# Altium PCB test.PcbDoc
Units mil, origin at the board's own origin, x right, y up, seen from the top; angles counter-clockwise.
Board outline 6000 x 4000 mil, 4 copper layers (Top Layer, Layer 1, Layer 2, Bottom Layer), stack 23.756 mil thick; 294 components, 277 nets, 1509 pads, 16 vias.
Unrouted connection lines stored in the file: 1091.
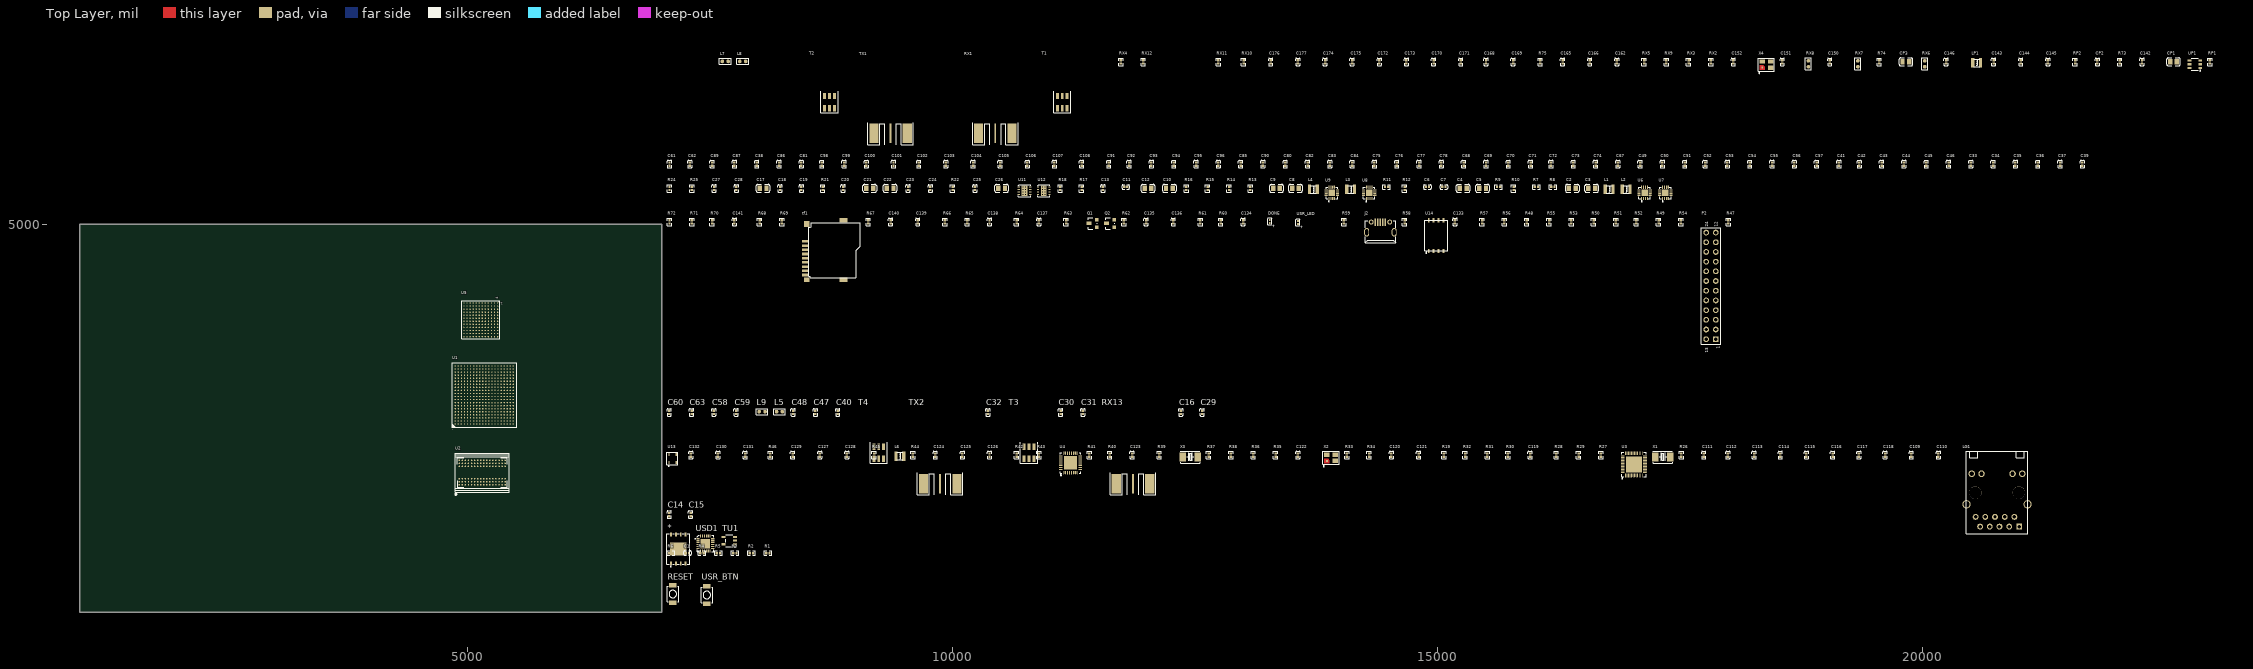
[diagram p0: Top Layer view]
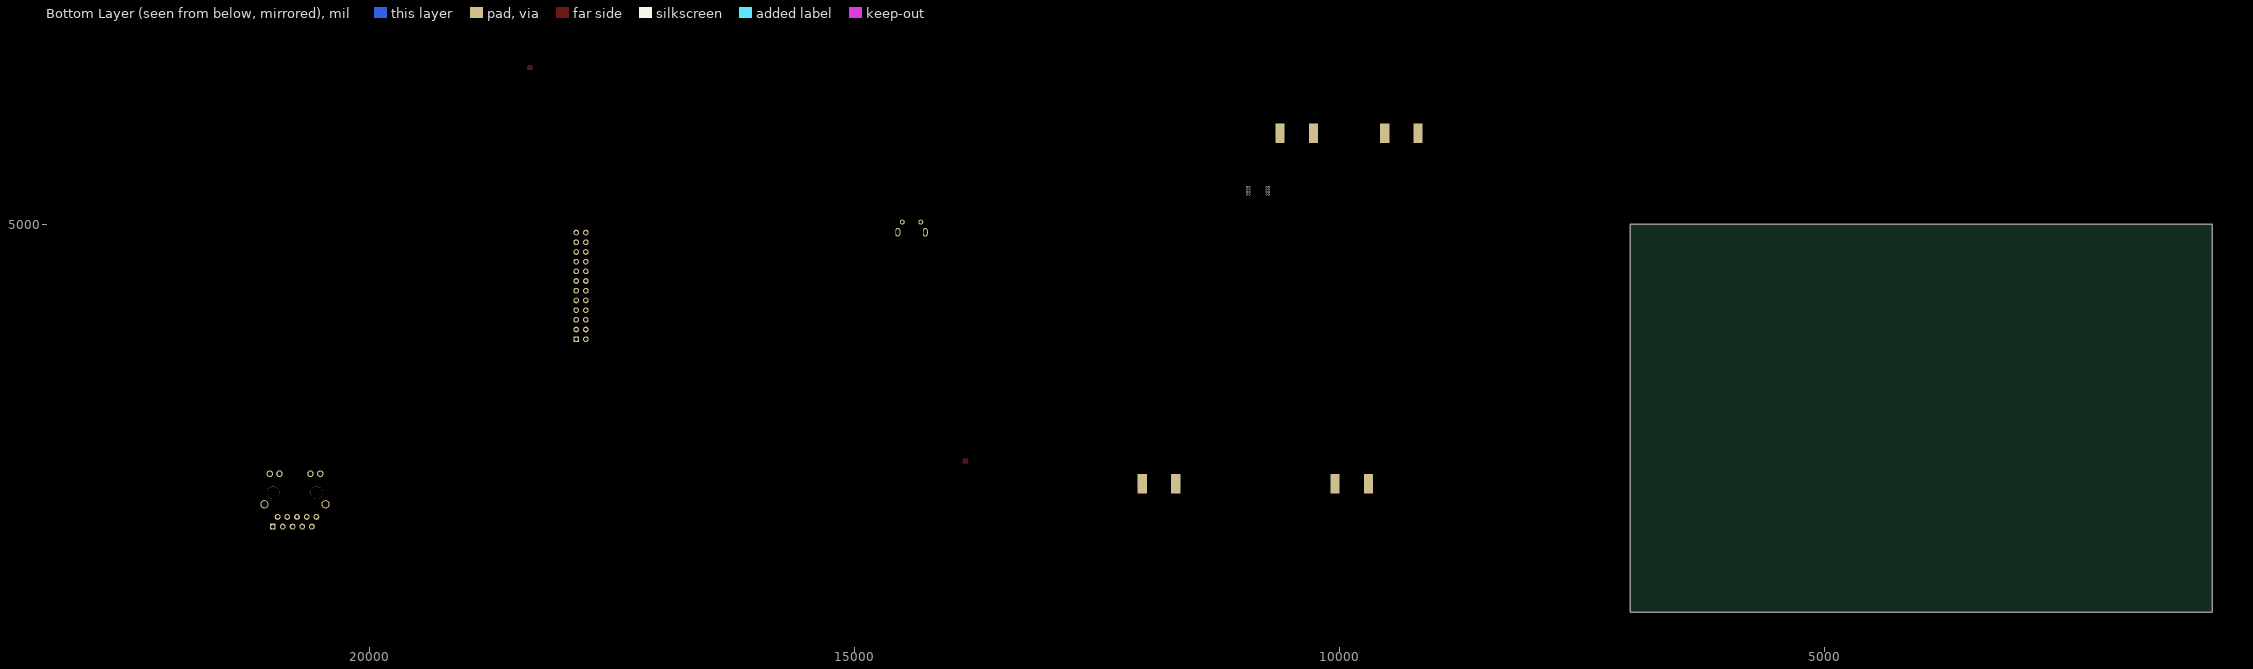
[diagram p1: Bottom Layer view, seen from below]

## Layer stack, top to bottom
Top Solder: solder mask 0.4, Solder Resist, Dk 3.5
Top Layer: signal copper 1.4
Dielectric 2: prepreg 2.8, PP-006, Dk 4.1
Layer 1: signal copper 1.378
Dielectric 1: dielectric 12.6, FR-4, Dk 4.8
Layer 2: signal copper 1.378
Dielectric 3: prepreg 2.8, PP-006, Dk 4.1
Bottom Layer: signal copper 1.4
Bottom Solder: solder mask 0.4, Solder Resist, Dk 3.5

## Board outline
1000,1000 7000,1000 7000,5000 1000,5000

## Design rules (kind name [scope] priority, off if disabled: settings)
Clearance [All] p1: gap=4 ignorepadtopadclearanceinfootprint=FALSE
ComponentClearance [All] p1: gap=0 collisioncheckmode=3 verticalgap=0 showdistances=FALSE
DiffPairsRouting [All] p1: maxlimit=10 minlimit=5 mostfreqgap=5 toplayer_minwidth=5 toplayer_maxwidth=15 toplayer_prefwidth=5 midlayer1_minwidth=5 midlayer1_maxwidth=15 midlayer1_prefwidth=5 midlayer2_minwidth=5 midlayer2_maxwidth=15 midlayer2_prefwidth=5 bottomlayer_minwidth=5 bottomlayer_maxwidth=15 bottomlayer_prefwidth=5 maxuncoupledlength=500
PolygonConnect [All] p1: connectstyle=Direct reliefconductorwidth=10 reliefentries=4 polygonreliefangle="90 Angle" airgapwidth=10
RoutingVias [All] p1: holewidth=7.87 width=17.72 viastyle="Through Hole" minholewidth=7.87 minwidth=15 maxholewidth=28 maxwidth=50
SolderMaskExpansion [All] p1: expansion=4 istentingtop=FALSE
Width [All] p1: maxlimit=100 minlimit=4 preferedwidth=4
28 further rules are at their usual default settings.

## Classes and differential pairs
component class "08 BALUN": C16 C29 C30 C31 C32 C40 C47 C48 C58 C59 C60 C63 L5 L7 L8 L9 RX1 RX13 T1 T2 T3 T4 TX1 TX2
net class DQ815: DDR3_DM1 DDR3_DQ8 DDR3_DQ9 DDR3_DQ10 DDR3_DQ11 DDR3_DQ12 DDR3_DQ13 DDR3_DQ14 DDR3_DQ15 DDR3_DQS1_N DDR3_DQS1_P
net class DQ07: DDR3_DM0 DDR3_DQ0 DDR3_DQ1 DDR3_DQ2 DDR3_DQ3 DDR3_DQ4 DDR3_DQ5 DDR3_DQ6 DDR3_DQ7 DDR3_DQS0_N DDR3_DQS0_P
net class ADDRES: DDR3_A0 DDR3_A1 DDR3_A2 DDR3_A3 DDR3_A4 DDR3_A5 DDR3_A6 DDR3_A7 DDR3_A8 DDR3_A9 DDR3_A10 DDR3_A11 DDR3_A12 DDR3_A13 DDR3_A14 DDR3_BA0 DDR3_BA1 DDR3_BA2 DDR3_CAS DDR3_CK_N DDR3_CK_P DDR3_CKE DDR3_CS DDR3_ODT DDR3_RAS DDR3_WE
component class "07 AD9363": C14 C15 C142 C143 C144 C145 C146 C150 C151 C152 C162 C165 C166 C168 C169 C170 C171 C172 C173 C174 C175 C176 C177 CP1 CP2 CP3 LP1 R73 R74 R75 RP1 RP2 RX2 RX3 RX4 RX5 RX6 RX7 RX8 RX9 RX10 RX11 RX12 U5 UP1 X4
component class "06 ZYNQ_POWER": C33 C34 C35 C36 C37 C38 C39 C41 C42 C43 C44 C45 C46 C49 C50 C51 C52 C53 C54 C55 C56 C57 C61 C62 C67 C68 C69 C70 C71 C72 C73 C74 C75 C76 C77 C78 C80 C81 C82 C83 C84 C85 C86 C87 C89 C90 C91 C92 C93 C94 C95 C96 C98 C99 C100 C101 C102 C103 C104 C105 C106 C107 C108
component class "05 POWER-SUPPLY": C2 C3 C4 C5 C6 C7 C8 C9 C10 C11 C12 C13 C17 C18 C19 C20 C21 C22 C23 C24 C25 C26 C27 C28 L1 L2 L3 L4 R7 R8 R9 R10 R11 R12 R13 R14 R15 R16 R17 R18 R21 R22 R24 R25 U6 U7 U8 U9 U11 U12
component class "04 ZYNQ_BANK0": * C133 C134 C135 C136 C137 C138 C139 C140 C141 DONE J2 P2 Q1 Q2 R47 R48 R49 R50 R51 R52 R53 R54 R55 R56 R57 R58 R59 R60 R61 R62 R63 R64 R65 R66 R67 R68 R69 R70 R71 R72 tf1 TU1 U14 USD1 USR_LED
component class "03 ZYNQ_PL-BANK34-35": U1
component class "02 ZYNQ_PS-BANK500-501": C109 C110 C111 C112 C113 C114 C115 C116 C117 C118 C119 C120 C121 C122 C123 C124 C125 C126 C127 C128 C129 C130 C131 C132 L6 LG1 R19 R26 R27 R28 R29 R30 R31 R32 R33 R34 R35 R36 R37 R38 R39 R40 R41 R42 R43 R44 R45 R46 RESET U3 U4 U13 USR_BTN X1 X2 X3
component class "01 ZYNQ_DDR": C1 R1 R2 R3 R4 R5 R6 U2
differential pair TX1B: +TX1B_P -TX1B_N
differential pair RX1B: +RX1B_P -RX1B_N
differential pair USB_OTG: +USB_OTG_P -USB_OTG_N
differential pair TXF: +TXF_P -TXF_N
differential pair TX_FRAME: +TX_FRAME_P -TX_FRAME_N
differential pair TX_D5: +TX_D5_P -TX_D5_N
differential pair TX_D4: +TX_D4_P -TX_D4_N
differential pair TX_D3: +TX_D3_P -TX_D3_N
differential pair TX_D2: +TX_D2_P -TX_D2_N
differential pair TX_D1: +TX_D1_P -TX_D1_N
differential pair TX_D0: +TX_D0_P -TX_D0_N
differential pair TX1A: +TX1A_P -TX1A_N
differential pair RX_FRAME: +RX_FRAME_P -RX_FRAME_N
differential pair RX_D5: +RX_D5_P -RX_D5_N
differential pair RX_D4: +RX_D4_P -RX_D4_N
differential pair RX_D3: +RX_D3_P -RX_D3_N
differential pair RX_D2: +RX_D2_P -RX_D2_N
differential pair RX_D1: +RX_D1_P -RX_D1_N
differential pair RX_D0: +RX_D0_P -RX_D0_N
differential pair RX1A: +RX1A_P -RX1A_N
differential pair PHY_MDI3: +PHY_MDI3_P -PHY_MDI3_N
differential pair PHY_MDI2: +PHY_MDI2_P -PHY_MDI2_N
differential pair PHY_MDI1: +PHY_MDI1_P -PHY_MDI1_N
differential pair PHY_MDI0: +PHY_MDI0_P -PHY_MDI0_N
differential pair FB: +FB_P -FB_N
differential pair FB_CLK: +FB_CLK_P -FB_CLK_N
differential pair DDR3_DQS1: +DDR3_DQS1_P -DDR3_DQS1_N
differential pair DDR3_DQS0: +DDR3_DQS0_P -DDR3_DQS0_N
differential pair DDR3_CK: +DDR3_CK_P -DDR3_CK_N
differential pair DATA_CLK: +DATA_CLK_P -DATA_CLK_N
differential pair 2: +2_P -2_N
differential pair 1: +1_P -1_N

## Components (designator, comment, footprint, x,y, rotation, side; value= is the part's Value field where it differs from the comment)
* "W25Q128" W25Q256 7171,1651 r0 top
C1 "104" LC-0402_C 7265,1610 r0 top
C2 "10μF" LC-0805_C 16390,5370 r0 top
C3 "10μF" LC-0805_C 16590,5370 r0 top
C4 "10μF" LC-0805_C 15265,5370 r0 top
C5 "10μF" LC-0805_C 15465,5370 r0 top
C6 "0.1μF" LC-0402_C 14895,5385 r0 top
C7 "0.1μF" LC-0402_C 15065,5385 r0 top
C8 "10μF" LC-0805_C 13535,5370 r0 top
C9 "10μF" LC-0805_C 13340,5370 r0 top
C10 "10μF" LC-0805_C 12235,5370 r0 top
C11 "0.1μF" LC-0402_C 11785,5385 r0 top
C12 "10μF" LC-0805_C 12015,5370 r0 top
C13 "0.1μF" LC-0402_C 11550,5370 r90 top
C14 "1μ" LC-0402_C 7077,2007 r90 top
C15 "0.001μ" LC-0402_C 7297,2007 r90 top
C16 "18p" LC-0402_C 12353,3061 r90 top
C17 "2.2μF" LC-0805_C 8045,5370 r0 top
C18 "0.1μF" LC-0402_C 8220,5370 r90 top
C19 "3.3nF" LC-0402_C 8440,5370 r90 top
C20 "2.2μF" LC-0402_C 8870,5370 r90 top
C21 "0.1μF" LC-0805_C 9145,5370 r0 top
C22 "2.2μF" LC-0805_C 9355,5370 r0 top
C23 "0.1μF" LC-0402_C 9540,5370 r90 top
C24 "3.3nF" LC-0402_C 9770,5370 r90 top
C25 "2.2μF" LC-0402_C 10230,5370 r90 top
C26 "0.1μF" LC-0805_C 10505,5370 r0 top
C27 "0.1μF" LC-0402_C 7540,5370 r90 top
C28 "0.1μF" LC-0402_C 7770,5370 r90 top
C29 "18p" LC-0402_C 12573,3061 r90 top
C30 "18p" LC-0402_C 11113,3061 r90 top
C31 "18p" LC-0402_C 11343,3061 r90 top
C32 "18p" LC-0402_C 10364,3061 r90 top
C33 "10μF" LC-0402_C 20500,5620 r90 top
C34 "10μF" LC-0402_C 20730,5620 r90 top
C35 "10μF" LC-0402_C 20960,5620 r90 top
C36 "10μF" LC-0402_C 21190,5620 r90 top
C37 "10μF" LC-0402_C 21420,5620 r90 top
C38 "10μF" LC-0402_C 7980,5620 r90 top
C39 "10μF" LC-0402_C 21650,5620 r90 top
C40 "18p" LC-0402_C 8815,3061 r90 top
C41 "10μF" LC-0402_C 19140,5620 r90 top
C42 "10μF" LC-0402_C 19350,5620 r90 top
C43 "10μF" LC-0402_C 19580,5620 r90 top
C44 "10μF" LC-0402_C 19810,5620 r90 top
C45 "10μF" LC-0402_C 20040,5620 r90 top
C46 "10μF" LC-0402_C 20270,5620 r90 top
C47 "18p" LC-0402_C 8585,3061 r90 top
C48 "18p" LC-0402_C 8355,3061 r90 top
C49 "10μF" LC-0402_C 17090,5620 r90 top
C50 "10μF" LC-0402_C 17320,5620 r90 top
C51 "10μF" LC-0402_C 17550,5620 r90 top
C52 "10μF" LC-0402_C 17760,5620 r90 top
C53 "10μF" LC-0402_C 17990,5620 r90 top
C54 "10μF" LC-0402_C 18220,5620 r90 top
C55 "10μF" LC-0402_C 18450,5620 r90 top
C56 "10μF" LC-0402_C 18680,5620 r90 top
C57 "10μF" LC-0402_C 18910,5620 r90 top
C58 "10μ" LC-0402_C 7537,3061 r90 top
C59 "0.001μ" LC-0402_C 7767,3061 r90 top
C60 "10μ" LC-0402_C 7077,3061 r90 top
C61 "10μF" LC-0402_C 7080,5620 r90 top
C62 "10μF" LC-0402_C 7290,5620 r90 top
C63 "0.001μ" LC-0402_C 7307,3061 r90 top
C67 "10μF" LC-0402_C 16860,5620 r90 top
C68 "10μF" LC-0402_C 15270,5620 r90 top
C69 "10μF" LC-0402_C 15500,5620 r90 top
C70 "10μF" LC-0402_C 15730,5620 r90 top
C71 "10μF" LC-0402_C 15960,5620 r90 top
C72 "10μF" LC-0402_C 16170,5620 r90 top
C73 "10μF" LC-0402_C 16400,5620 r90 top
C74 "10μF" LC-0402_C 16630,5620 r90 top
C75 "10μF" LC-0402_C 14350,5620 r90 top
C76 "10μF" LC-0402_C 14580,5620 r90 top
C77 "10μF" LC-0402_C 14810,5620 r90 top
C78 "10μF" LC-0402_C 15040,5620 r90 top
C80 "10μF" LC-0402_C 13430,5620 r90 top
C81 "10μF" LC-0402_C 8440,5620 r90 top
C82 "10μF" LC-0402_C 13660,5620 r90 top
C83 "10μF" LC-0402_C 13890,5620 r90 top
C84 "10μF" LC-0402_C 14120,5620 r90 top
C85 "10μF" LC-0402_C 12970,5620 r90 top
C86 "10μF" LC-0402_C 8210,5620 r90 top
C87 "10μF" LC-0402_C 7750,5620 r90 top
C89 "10μF" LC-0402_C 7520,5620 r90 top
C90 "10μF" LC-0402_C 13200,5620 r90 top
C91 "10μF" LC-0402_C 11610,5620 r90 top
C92 "10μF" LC-0402_C 11820,5620 r90 top
C93 "10μF" LC-0402_C 12050,5620 r90 top
C94 "10μF" LC-0402_C 12280,5620 r90 top
C95 "10μF" LC-0402_C 12510,5620 r90 top
C96 "10μF" LC-0402_C 12740,5620 r90 top
C98 "10μF" LC-0402_C 8650,5620 r90 top
C99 "10μF" LC-0402_C 8880,5620 r90 top
C100 "10μF" LC-0402_C 9110,5620 r90 top
C101 "10μF" LC-0402_C 9390,5620 r90 top
C102 "10μF" LC-0402_C 9650,5620 r90 top
C103 "10μF" LC-0402_C 9930,5620 r90 top
C104 "10μF" LC-0402_C 10210,5620 r90 top
C105 "10μF" LC-0402_C 10490,5620 r90 top
C106 "10μF" LC-0402_C 10770,5620 r90 top
C107 "10μF" LC-0402_C 11050,5620 r90 top
C108 "10μF" LC-0402_C 11330,5620 r90 top
C109 "1μ" LC-0402_C 19885,2620 r90 top
C110 "1μ" LC-0402_C 20165,2620 r90 top
C111 "1μ" LC-0402_C 17745,2620 r90 top
C112 "0.1μ" LC-0402_C 17995,2620 r90 top
C113 "1μ" LC-0402_C 18265,2620 r90 top
C114 "1μ" LC-0402_C 18535,2620 r90 top
C115 "1μ" LC-0402_C 18805,2620 r90 top
C116 "1μ" LC-0402_C 19075,2620 r90 top
C117 "18p" LC-0402_C 19345,2620 r90 top
C118 "18p" LC-0402_C 19615,2620 r90 top
C119 "0.01μ" LC-0402_C 15955,2620 r90 top
C120 "0.1μ" LC-0402_C 14525,2620 r90 top
C121 "10μ" LC-0402_C 14805,2620 r90 top
C122 "18p" LC-0402_C 13560,2620 r90 top
C123 "18p" LC-0402_C 11850,2620 r90 top
C124 "1μ" LC-0402_C 9820,2620 r90 top
C125 "1μ" LC-0402_C 10100,2620 r90 top
C126 "1μ" LC-0402_C 10380,2620 r90 top
C127 "1μ" LC-0402_C 8630,2620 r90 top
C128 "1μ" LC-0402_C 8910,2620 r90 top
C129 "4.7μ" LC-0402_C 8350,2620 r90 top
C130 "1μ" LC-0402_C 7580,2620 r90 top
C131 "1μ" LC-0402_C 7860,2620 r90 top
C132 "0.1μ" LC-0402_C 7300,2620 r90 top
C133 "0.1μ" LC-0402_C 15180,5025 r90 top
C134 "0.1μ" LC-0402_C 12995,5025 r90 top
C135 "4.7μ" LC-0402_C 11995,5025 r90 top
C136 "4.7μ" LC-0402_C 12275,5025 r90 top
C137 "4.7μ" LC-0402_C 10890,5025 r90 top
C138 "0.1μ" LC-0402_C 10380,5025 r90 top
C139 "10μ" LC-0402_C 9640,5025 r90 top
C140 "0.1μ" LC-0402_C 9360,5025 r90 top
C141 "0.1μ" LC-0402_C 7750,5025 r90 top
C142 "1μ" LC-0402_C 22265,6675 r90 top
C143 "0.1μ" LC-0402_C 20735,6675 r90 top
C144 "10μ" LC-0402_C 21015,6675 r90 top
C145 "1μ" LC-0402_C 21295,6675 r90 top
C146 "0.001μ" LC-0402_C 20245,6675 r90 top
C150 "18p" LC-0402_C 19045,6675 r90 top
C151 "0.001μ" LC-0402_C 18555,6675 r90 top
C152 "18p" LC-0402_C 18050,6675 r90 top
C162 "10μ" LC-0402_C 16850,6675 r90 top
C165 "10μ" LC-0402_C 16290,6675 r90 top
C166 "1μ" LC-0402_C 16570,6675 r90 top
C168 "1μ" LC-0402_C 15500,6675 r90 top
C169 "0.001μ" LC-0402_C 15780,6675 r90 top
C170 "1μ" LC-0402_C 14960,6675 r90 top
C171 "0.001μ" LC-0402_C 15240,6675 r90 top
C172 "1μ" LC-0402_C 14400,6675 r90 top
C173 "0.001μ" LC-0402_C 14680,6675 r90 top
C174 "1μ" LC-0402_C 13840,6675 r90 top
C175 "0.001μ" LC-0402_C 14120,6675 r90 top
C176 "1μ" LC-0402_C 13280,6675 r90 top
C177 "0.001μ" LC-0402_C 13560,6675 r90 top
CP1 "22uF" LC-0805_C 22590,6675 r0 top
CP2 "22pF" LC-0402_C 21805,6675 r90 top
CP3 "22uF" LC-0805_C 19830,6675 r0 top
DONE "LED" D0402 13270,5030 r90 top
J2 "microusb" "micro usb" 14315,5020 r0 top
L1 "2.2uH" L1008 16770,5360 r0 top
L2 "2.2uH" L1008 16945,5360 r0 top
L3 "2.2uH" L1008 14105,5360 r0 top
L4 "2.2uH" L1008 13720,5360 r0 top
L5 "330nh" LC-0603_L 8214,3068 r0 top
L6 "2.2uH" L1008 9455,2610 r0 top
L7 "330nh" LC-0603_L 7655,6680 r0 top
L8 "330nh" LC-0603_L 7835,6680 r0 top
L9 "330nh" LC-0603_L 8035,3068 r0 top
LG1 "HR911130C" HR911130C 20770,2155 r0 top
LP1 "4.7uH" L1008 20560,6665 r0 top
P2 "Header 12X2A" HDR2X12_CEN 17870,3815 r90 top
Q1 "AO3400" NMOS 11405,5010 r0 top
Q2 "AO3400" NMOS 11585,5010 r0 top
R1 "4.7K" LC-0402_R 8095,1610 r0 top
R2 "82R" LC-0402_R 7925,1610 r0 top
R3 "82R" LC-0402_R 7755,1610 r0 top
R4 "4.7K" LC-0402_R 7415,1610 r0 top
R5 "4.7K" LC-0402_R 7585,1610 r0 top
R6 "240R" LC-0402_R 7095,1610 r0 top
R7 "100K" LC-0402_R 16020,5385 r0 top
R8 "10K" LC-0402_R 16190,5385 r0 top
R9 "4.99K" LC-0402_R 15630,5385 r0 top
R10 "18.7K" LC-0402_R 15785,5370 r90 top
R11 "20K" LC-0402_R 14475,5385 r0 top
R12 "15K" LC-0402_R 14660,5370 r90 top
R13 "10K" LC-0402_R 13070,5370 r90 top
R14 "13K" LC-0402_R 12850,5370 r90 top
R15 "10K" LC-0402_R 12630,5370 r90 top
R16 "56.2K" LC-0402_R 12410,5370 r90 top
R17 "15K" LC-0402_R 11330,5370 r90 top
R18 "18K" LC-0402_R 11110,5370 r90 top
R19 "10K" LC-0402_R 15065,2620 r90 top
R21 "6.25K" LC-0402_R 8660,5370 r90 top
R22 "6.25K" LC-0402_R 10000,5370 r90 top
R24 "10K" LC-0402_R 7080,5370 r90 top
R25 "10K" LC-0402_R 7310,5370 r90 top
R26 "2.49K" LC-0402_R 17515,2620 r90 top
R27 "4.7K" LC-0402_R 16685,2620 r90 top
R28 "33R" LC-0402_R 16225,2620 r90 top
R29 "33R" LC-0402_R 16455,2620 r90 top
R30 "10K" LC-0402_R 15725,2620 r90 top
R31 "330R" LC-0402_R 15515,2620 r90 top
R32 "330R" LC-0402_R 15285,2620 r90 top
R33 "1.5K" LC-0402_R 14065,2620 r90 top
R34 "1.5K" LC-0402_R 14295,2620 r90 top
R35 "4.7K" LC-0402_R 13330,2620 r90 top
R36 "4.7K" LC-0402_R 13100,2620 r90 top
R37 "33R" LC-0402_R 12640,2620 r90 top
R38 "4.7K" LC-0402_R 12870,2620 r90 top
R39 "4.7K" LC-0402_R 12130,2620 r90 top
R40 "4.7K" LC-0402_R 11620,2620 r90 top
R41 "4.7K" LC-0402_R 11410,2620 r90 top
R42 "33R" LC-0402_R 10660,2620 r90 top
R43 "4.7K" LC-0402_R 10890,2620 r90 top
R44 "8.06K" LC-0402_R 9590,2620 r90 top
R45 "4.7K" LC-0402_R 9190,2620 r90 top
R46 "4.7K" LC-0402_R 8120,2620 r90 top
R47 "20K" LC-0402_R 18000,5025 r90 top
R48 "1K" LC-0402_R 15920,5025 r90 top
R49 "20K" LC-0402_R 17280,5025 r90 top
R50 "20K" LC-0402_R 16610,5025 r90 top
R51 "20K" LC-0402_R 16840,5025 r90 top
R52 "20K" LC-0402_R 17050,5025 r90 top
R53 "20K" LC-0402_R 16380,5025 r90 top
R54 "10K" LC-0402_R 17510,5025 r90 top
R55 "4.7K" LC-0402_R 16150,5025 r90 top
R56 "20K" LC-0402_R 15690,5025 r90 top
R57 "4.7K" LC-0402_R 15460,5025 r90 top
R58 "33R" LC-0402_R 14660,5025 r90 top
R59 "470R" LC-0402_R 14035,5025 r90 top
R60 "470R" LC-0402_R 12765,5025 r90 top
R61 "470R" LC-0402_R 12555,5025 r90 top
R62 "4.7K" LC-0402_R 11765,5025 r90 top
R63 "4.7K" LC-0402_R 11170,5025 r90 top
R64 "0R" LC-0402_R 10660,5025 r90 top
R65 "10K" LC-0402_R 10150,5025 r90 top
R66 "1K" LC-0402_R 9920,5025 r90 top
R67 "0R" LC-0402_R 9130,5025 r90 top
R68 "100K" LC-0402_R 8010,5025 r90 top
R69 "10K" LC-0402_R 8240,5025 r90 top
R70 "330R" LC-0402_R 7520,5025 r90 top
R71 "10K" LC-0402_R 7310,5025 r90 top
R72 "40.2R" LC-0402_R 7080,5025 r90 top
R73 "1R" LC-0402_R 22035,6675 r90 top
R74 "1R" LC-0402_R 19555,6675 r90 top
R75 "14.3K" LC-0402_R 16060,6675 r90 top
RESET "SW-PB" 开关 7114,1190 r90 top
RP1 "10K" LC-0402_R 22965,6675 r90 top
RP2 "20K" LC-0402_R 21575,6675 r90 top
RX1 "JCCEM001" CNSMARAL687W375H171 10440,5935 r90 top
RX2 "0R" LC-0402_R 17820,6675 r90 top
RX3 "0R" LC-0402_R 17590,6675 r90 top
RX4 "0R" LC-0402_R 11735,6675 r90 top
RX5 "0R" LC-0402_R 17130,6675 r90 top
RX6 "0R" LC-0603_L 20025,6655 r90 top
RX7 "0R" LC-0603_L 19335,6655 r90 top
RX8 "0R" LC-0603_L 18825,6655 r90 top
RX9 "0R" LC-0402_R 17360,6675 r90 top
RX10 "0R" LC-0402_R 13000,6675 r90 top
RX11 "0R" LC-0402_R 12740,6675 r90 top
RX12 "0R" LC-0402_R 11965,6675 r90 top
RX13 "JCCEM001" CNSMARAL687W375H171 11860,2323 r90 top
T1 "TCM1-63AX+" TSML150W160H160 11130,6260 r0 top
T2 "TCM1-63AX+" TSML150W160H160 8730,6260 r0 top
T3 "TCM1-63AX+" TSML150W160H160 10787,2644 r0 top
T4 "TCM1-63AX+" TSML150W160H160 9238,2644 r0 top
tf1 "TF-SD" TF 8675,4735 r0 top
TU1 "TPS2051BDBVR" TPS2051BDBVR 7711,1738 r0 top
TX1 "JCCEM001" CNSMARAL687W375H171 9360,5935 r90 top
TX2 "JCCEM001" CNSMARAL687W375H171 9871,2323 r90 top
U1 "XC7Z010-CLG400" CLG400-0.8 5170.28,3239.76 r90 top
U2 "MT41J64M16JT-187EG" FBGA96 4876.87,2215.43 r90 top
U3 "RTL8211E-VB-CG" LC-QFN-48_6x6x04P 17025,2525 r0 top
U4 "USB3320C" LC-QFN-32_5x5x05P 11215,2540 r0 top
U5 "AD9363" AD936X 5142.48,4051.46 r270 top
U6 "TLV62130" TLV62130RGT 17135,5325 r0 top
U7 "TLV62130" TLV62130RGT 17350,5325 r0 top
U8 "TLV62130" TLV62130RGT 14295,5325 r0 top
U9 "TLV62130" TLV62130RGT 13910,5325 r0 top
U11 "TPS7A8101" TPS7A8101 10740,5345 r0 top
U12 "TPS7A8101" TPS7A8101 10940,5345 r0 top
U13 "TCM811TE" TCM811TERCTR 7110,2585 r0 top
U14 "S25FL256SAGNFI00" MLP8 14985,4865 r90 top
UP1 "AP3419" AP3419 22815,6650 r0 top
USD1 "TXS02612RTWR" TXS02612RTWR 7453,1704 r0 top
USR_BTN "SW-PB" 开关 7464,1180 r90 top
USR_LED "LED" D0402 13560,5020 r90 top
X1 "25M" LC-SMD-5032_2P 17325,2600 r0 top
X2 "33.333MHz" OSC-SMD_4P-L3.2-W2.5-BL 13955,2615 r0 top
X3 "24M" LC-SMD-5032_2P 12450,2600 r0 top
X4 "40MHz" OSC-SMD_4P-L3.2-W2.5-BL 18445,6670 r0 top

## Footprints (in the part's own frame and the unit in brackets; to place one, negate y for a bottom-side part, rotate by r counter-clockwise, add the part's x,y. Pads: shape width x height; smd on the part's side, far side on the other; paste and mask are expansions set on the pad)
AD936X [mil]
  round 14 smd: A1(-137.01,164.51) A2(-105.51,164.51) A3(-74.02,164.51) A4(-42.52,164.51) A5(-11.02,164.51) A6(20.47,164.51) A7(51.97,164.51) A8(83.46,164.51) A9(114.96,164.51) A10(146.46,164.51) A11(177.95,164.51) A12(209.45,164.51) B1(-137.01,133.01) B2(-105.51,133.01) B3(-74.02,133.01) B4(-42.52,133.01) B5(-11.02,133.01) B6(20.47,133.01) B7(51.97,133.01) B8(83.46,133.01) B9(114.96,133.01) B10(146.46,133.01) B11(177.95,133.01) B12(209.45,133.01) C1(-137.01,101.52) C2(-105.51,101.52) C3(-74.02,101.52) C4(-42.52,101.52) C5(-11.02,101.52) C6(20.47,101.52) C7(51.97,101.52) C8(83.46,101.52) C9(114.96,101.52) C10(146.46,101.52) C11(177.95,101.52) C12(209.45,101.52) D1(-137.01,70.02) D2(-105.51,70.02) D3(-74.02,70.02) D4(-42.52,70.02) D5(-11.02,70.02) D6(20.47,70.02) D7(51.97,70.02) D8(83.46,70.02) D9(114.96,70.02) D10(146.46,70.02) D11(177.95,70.02) D12(209.45,70.02) E1(-137.01,38.52) E2(-105.51,38.52) E3(-74.02,38.52) E4(-42.52,38.52) E5(-11.02,38.52) E6(20.47,38.52) E7(51.97,38.52) E8(83.46,38.52) E9(114.96,38.52) E10(146.46,38.52) E11(177.95,38.52) E12(209.45,38.52) F1(-137.01,7.03) F2(-105.51,7.03) F3(-74.02,7.03) F4(-42.52,7.03) F5(-11.02,7.03) F6(20.47,7.03) F7(51.97,7.03) F8(83.46,7.03) F9(114.96,7.03) F10(146.46,7.03) F11(177.95,7.03) F12(209.45,7.03) G1(-137.01,-24.47) G2(-105.51,-24.47) G3(-74.02,-24.47) G4(-42.52,-24.47) G5(-11.02,-24.47) G6(20.47,-24.47) G7(51.97,-24.47) G8(83.46,-24.47) G9(114.96,-24.47) G10(146.46,-24.47) G11(177.95,-24.47) G12(209.45,-24.47) H1(-137.01,-55.96) H2(-105.51,-55.96) H3(-74.02,-55.96) H4(-42.52,-55.96) H5(-11.02,-55.96) H6(20.47,-55.96) H7(51.97,-55.96) H8(83.46,-55.96) H9(114.96,-55.96) H10(146.46,-55.96) H11(177.95,-55.96) H12(209.45,-55.96) J1(-137.01,-87.46) J2(-105.51,-87.46) J3(-74.02,-87.46) J4(-42.52,-87.46) J5(-11.02,-87.46) J6(20.47,-87.46) J7(51.97,-87.46) J8(83.46,-87.46) J9(114.96,-87.46) J10(146.46,-87.46) J11(177.95,-87.46) J12(209.45,-87.46) K1(-137.01,-118.96) K2(-105.51,-118.96) K3(-74.02,-118.96) K4(-42.52,-118.96) K5(-11.02,-118.96) K6(20.47,-118.96) K7(51.97,-118.96) K8(83.46,-118.96) K9(114.96,-118.96) K10(146.46,-118.96) K11(177.95,-118.96) K12(209.45,-118.96) L1(-137.01,-150.45) L2(-105.51,-150.45) L3(-74.02,-150.45) L4(-42.52,-150.45) L5(-11.02,-150.45) L6(20.47,-150.45) L7(51.97,-150.45) L8(83.46,-150.45) L9(114.96,-150.45) L10(146.46,-150.45) L11(177.95,-150.45) L12(209.45,-150.45) M1(-137.01,-181.95) M2(-105.51,-181.95) M3(-74.02,-181.95) M4(-42.52,-181.95) M5(-11.02,-181.95) M6(20.47,-181.95) M7(51.97,-181.95) M8(83.46,-181.95) M9(114.96,-181.95) M10(146.46,-181.95) M11(177.95,-181.95) M12(209.45,-181.95)
  silkscreen extent -161,-206 233,188
AP3419 [mm]
  rect 1x0.55 smd: 1(1.268,-0.95) 2(1.268,0) 3(1.268,0.95) 4(-1.532,0.95) 5(-1.532,0) 6(-1.532,-0.95)
  silkscreen extent -1.03,-1.78 1.39,1.55
CLG400-0.8 [mm]
  round 0.35 smd: A1(-7.6,7.6) A2(-6.8,7.6) A3(-6,7.6) A4(-5.2,7.6) A5(-4.4,7.6) A6(-3.6,7.6) A7(-2.8,7.6) A8(-2,7.6) A9(-1.2,7.6) A10(-0.4,7.6) A11(0.4,7.6) A12(1.2,7.6) A13(2,7.6) A14(2.8,7.6) A15(3.6,7.6) A16(4.4,7.6) A17(5.2,7.6) A18(6,7.6) A19(6.8,7.6) A20(7.6,7.6) B1(-7.6,6.8) B2(-6.8,6.8) B3(-6,6.8) B4(-5.2,6.8) B5(-4.4,6.8) B6(-3.6,6.8) B7(-2.8,6.8) B8(-2,6.8) B9(-1.2,6.8) B10(-0.4,6.8) B11(0.4,6.8) B12(1.2,6.8) B13(2,6.8) B14(2.8,6.8) B15(3.6,6.8) B16(4.4,6.8) B17(5.2,6.8) B18(6,6.8) B19(6.8,6.8) B20(7.6,6.8) C1(-7.6,6) C2(-6.8,6) C3(-6,6) C4(-5.2,6) C5(-4.4,6) C6(-3.6,6) C7(-2.8,6) C8(-2,6) C9(-1.2,6) C10(-0.4,6) C11(0.4,6) C12(1.2,6) C13(2,6) C14(2.8,6) C15(3.6,6) C16(4.4,6) C17(5.2,6) C18(6,6) C19(6.8,6) C20(7.6,6) D1(-7.6,5.2) D2(-6.8,5.2) D3(-6,5.2) D4(-5.2,5.2) D5(-4.4,5.2) D6(-3.6,5.2) D7(-2.8,5.2) D8(-2,5.2) D9(-1.2,5.2) D10(-0.4,5.2) D11(0.4,5.2) D12(1.2,5.2) D13(2,5.2) D14(2.8,5.2) D15(3.6,5.2) D16(4.4,5.2) D17(5.2,5.2) D18(6,5.2) D19(6.8,5.2) D20(7.6,5.2) E1(-7.6,4.4) E2(-6.8,4.4) E3(-6,4.4) E4(-5.2,4.4) E5(-4.4,4.4) E6(-3.6,4.4) E7(-2.8,4.4) E8(-2,4.4) E9(-1.2,4.4) E10(-0.4,4.4) E11(0.4,4.4) E12(1.2,4.4) E13(2,4.4) E14(2.8,4.4) E15(3.6,4.4) E16(4.4,4.4) E17(5.2,4.4) E18(6,4.4) E19(6.8,4.4) E20(7.6,4.4) F1(-7.6,3.6) F2(-6.8,3.6) F3(-6,3.6) F4(-5.2,3.6) F5(-4.4,3.6) F6(-3.6,3.6) F7(-2.8,3.6) F8(-2,3.6) F9(-1.2,3.6) F10(-0.4,3.6) F11(0.4,3.6) F12(1.2,3.6) F13(2,3.6) F14(2.8,3.6) F15(3.6,3.6) F16(4.4,3.6) F17(5.2,3.6) F18(6,3.6) F19(6.8,3.6) F20(7.6,3.6) G1(-7.6,2.8) G2(-6.8,2.8) G3(-6,2.8) G4(-5.2,2.8) G5(-4.4,2.8) G6(-3.6,2.8) G7(-2.8,2.8) G8(-2,2.8) G9(-1.2,2.8) G10(-0.4,2.8) G11(0.4,2.8) G12(1.2,2.8) G13(2,2.8) G14(2.8,2.8) G15(3.6,2.8) G16(4.4,2.8) G17(5.2,2.8) G18(6,2.8) G19(6.8,2.8) G20(7.6,2.8) H1(-7.6,2) H2(-6.8,2) H3(-6,2) H4(-5.2,2) H5(-4.4,2) H6(-3.6,2) H7(-2.8,2) H8(-2,2) H9(-1.2,2) H10(-0.4,2) H11(0.4,2) H12(1.2,2) H13(2,2) H14(2.8,2) H15(3.6,2) H16(4.4,2) H17(5.2,2) H18(6,2) H19(6.8,2) H20(7.6,2) J1(-7.6,1.2) J2(-6.8,1.2) J3(-6,1.2) J4(-5.2,1.2) J5(-4.4,1.2) J6(-3.6,1.2) J7(-2.8,1.2) J8(-2,1.2) J9(-1.2,1.2) J10(-0.4,1.2) J11(0.4,1.2) J12(1.2,1.2) J13(2,1.2) J14(2.8,1.2) J15(3.6,1.2) J16(4.4,1.2) J17(5.2,1.2) J18(6,1.2) J19(6.8,1.2) J20(7.6,1.2) K1(-7.6,0.4) K2(-6.8,0.4) K3(-6,0.4) K4(-5.2,0.4) K5(-4.4,0.4) K6(-3.6,0.4) K7(-2.8,0.4) K8(-2,0.4) K9(-1.2,0.4) K10(-0.4,0.4) K11(0.4,0.4) K12(1.2,0.4) K13(2,0.4) K14(2.8,0.4) K15(3.6,0.4) K16(4.4,0.4) K17(5.2,0.4) K18(6,0.4) K19(6.8,0.4) K20(7.6,0.4) L1(-7.6,-0.4) L2(-6.8,-0.4) L3(-6,-0.4) L4(-5.2,-0.4) L5(-4.4,-0.4) L6(-3.6,-0.4) L7(-2.8,-0.4) L8(-2,-0.4) L9(-1.2,-0.4) L10(-0.4,-0.4) L11(0.4,-0.4) L12(1.2,-0.4) L13(2,-0.4) L14(2.8,-0.4) L15(3.6,-0.4) L16(4.4,-0.4) L17(5.2,-0.4) L18(6,-0.4) L19(6.8,-0.4) L20(7.6,-0.4) M1(-7.6,-1.2) M2(-6.8,-1.2) M3(-6,-1.2) M4(-5.2,-1.2) M5(-4.4,-1.2) M6(-3.6,-1.2) M7(-2.8,-1.2) M8(-2,-1.2) M9(-1.2,-1.2) M10(-0.4,-1.2) M11(0.4,-1.2) M12(1.2,-1.2) M13(2,-1.2) M14(2.8,-1.2) M15(3.6,-1.2) M16(4.4,-1.2) M17(5.2,-1.2) M18(6,-1.2) M19(6.8,-1.2) M20(7.6,-1.2) N1(-7.6,-2) N2(-6.8,-2) N3(-6,-2) N4(-5.2,-2) N5(-4.4,-2) N6(-3.6,-2) N7(-2.8,-2) N8(-2,-2) N9(-1.2,-2) N10(-0.4,-2) N11(0.4,-2) N12(1.2,-2) N13(2,-2) N14(2.8,-2) N15(3.6,-2) N16(4.4,-2) N17(5.2,-2) N18(6,-2) N19(6.8,-2) N20(7.6,-2) P1(-7.6,-2.8) P2(-6.8,-2.8) P3(-6,-2.8) P4(-5.2,-2.8) P5(-4.4,-2.8) P6(-3.6,-2.8) P7(-2.8,-2.8) P8(-2,-2.8) P9(-1.2,-2.8) P10(-0.4,-2.8) P11(0.4,-2.8) P12(1.2,-2.8) P13(2,-2.8) P14(2.8,-2.8) P15(3.6,-2.8) P16(4.4,-2.8) P17(5.2,-2.8) P18(6,-2.8) P19(6.8,-2.8) P20(7.6,-2.8) R1(-7.6,-3.6) R2(-6.8,-3.6) R3(-6,-3.6) R4(-5.2,-3.6) R5(-4.4,-3.6) R6(-3.6,-3.6) R7(-2.8,-3.6) R8(-2,-3.6) R9(-1.2,-3.6) R10(-0.4,-3.6) R11(0.4,-3.6) R12(1.2,-3.6) R13(2,-3.6) R14(2.8,-3.6) R15(3.6,-3.6) R16(4.4,-3.6) R17(5.2,-3.6) R18(6,-3.6) R19(6.8,-3.6) R20(7.6,-3.6) T1(-7.6,-4.4) T2(-6.8,-4.4) T3(-6,-4.4) T4(-5.2,-4.4) T5(-4.4,-4.4) T6(-3.6,-4.4) T7(-2.8,-4.4) T8(-2,-4.4) T9(-1.2,-4.4) T10(-0.4,-4.4) T11(0.4,-4.4) T12(1.2,-4.4) T13(2,-4.4) T14(2.8,-4.4) T15(3.6,-4.4) T16(4.4,-4.4) T17(5.2,-4.4) T18(6,-4.4) T19(6.8,-4.4) T20(7.6,-4.4) U1(-7.6,-5.2) U2(-6.8,-5.2) U3(-6,-5.2) U4(-5.2,-5.2) U5(-4.4,-5.2) U6(-3.6,-5.2) U7(-2.8,-5.2) U8(-2,-5.2) U9(-1.2,-5.2) U10(-0.4,-5.2) U11(0.4,-5.2) U12(1.2,-5.2) U13(2,-5.2) U14(2.8,-5.2) U15(3.6,-5.2) U16(4.4,-5.2) U17(5.2,-5.2) U18(6,-5.2) U19(6.8,-5.2) U20(7.6,-5.2) V1(-7.6,-6) V2(-6.8,-6) V3(-6,-6) V4(-5.2,-6) V5(-4.4,-6) V6(-3.6,-6) V7(-2.8,-6) V8(-2,-6) V9(-1.2,-6) V10(-0.4,-6) V11(0.4,-6) V12(1.2,-6) V13(2,-6) V14(2.8,-6) V15(3.6,-6) V16(4.4,-6) V17(5.2,-6) V18(6,-6) V19(6.8,-6) V20(7.6,-6) W1(-7.6,-6.8) W2(-6.8,-6.8) W3(-6,-6.8) W4(-5.2,-6.8) W5(-4.4,-6.8) W6(-3.6,-6.8) W7(-2.8,-6.8) W8(-2,-6.8) W9(-1.2,-6.8) W10(-0.4,-6.8) W11(0.4,-6.8) W12(1.2,-6.8) W13(2,-6.8) W14(2.8,-6.8) W15(3.6,-6.8) W16(4.4,-6.8) W17(5.2,-6.8) W18(6,-6.8) W19(6.8,-6.8) W20(7.6,-6.8) Y1(-7.6,-7.6) Y2(-6.8,-7.6) Y3(-6,-7.6) Y4(-5.2,-7.6) Y5(-4.4,-7.6) Y6(-3.6,-7.6) Y7(-2.8,-7.6) Y8(-2,-7.6) Y9(-1.2,-7.6) Y10(-0.4,-7.6) Y11(0.4,-7.6) Y12(1.2,-7.6) Y13(2,-7.6) Y14(2.8,-7.6) Y15(3.6,-7.6) Y16(4.4,-7.6) Y17(5.2,-7.6) Y18(6,-7.6) Y19(6.8,-7.6) Y20(7.6,-7.6)
  silkscreen extent -9.02,-8.5 8.5,8.5
CNSMARAL687W375H171 [mil]
  rect 200x19 smd: 1(2.5,0)
  rect 200x95 smd: 2(2.5,172.5) 4(2.5,-172.5)
  rect 200x95 smd far side: 3(2.5,172.5) 5(2.5,-172.5)
  silkscreen extent -113,-235 113,235
D0402 [mm]
  rect 0.51x0.51 smd: 1(-0.41,0) 2(0.41,0)
  silkscreen extent -0.91,-0.5 0.91,0.5
FBGA96 [mm]
  round 0.4 smd: A1(2.504,-0.906) A2(3.304,-0.906) A3(4.104,-0.906) A7(7.304,-0.906) A8(8.104,-0.906) A9(8.904,-0.906) B1(2.504,-1.706) B2(3.304,-1.706) B3(4.104,-1.706) B7(7.304,-1.706) B8(8.104,-1.706) B9(8.904,-1.706) C1(2.504,-2.506) C2(3.304,-2.506) C3(4.104,-2.506) C7(7.304,-2.506) C8(8.104,-2.506) C9(8.904,-2.506) D1(2.504,-3.306) D2(3.304,-3.306) D3(4.104,-3.306) D7(7.304,-3.306) D8(8.104,-3.306) D9(8.904,-3.306) E1(2.504,-4.106) E2(3.304,-4.106) E3(4.104,-4.106) E7(7.304,-4.106) E8(8.104,-4.106) E9(8.904,-4.106) F1(2.504,-4.906) F2(3.304,-4.906) F3(4.104,-4.906) F7(7.304,-4.906) F8(8.104,-4.906) F9(8.904,-4.906) G1(2.504,-5.706) G2(3.304,-5.706) G3(4.104,-5.706) G7(7.304,-5.706) G8(8.104,-5.706) G9(8.904,-5.706) H1(2.504,-6.506) H2(3.304,-6.506) H3(4.104,-6.506) H7(7.304,-6.506) H8(8.104,-6.506) H9(8.904,-6.506) J1(2.504,-7.306) J2(3.304,-7.306) J3(4.104,-7.306) J7(7.304,-7.306) J8(8.104,-7.306) J9(8.904,-7.306) K1(2.504,-8.106) K2(3.304,-8.106) K3(4.104,-8.106) K7(7.304,-8.106) K8(8.104,-8.106) K9(8.904,-8.106) L1(2.504,-8.906) L2(3.304,-8.906) L3(4.104,-8.906) L7(7.304,-8.906) L8(8.104,-8.906) L9(8.904,-8.906) M1(2.504,-9.706) M2(3.304,-9.706) M3(4.104,-9.706) M7(7.304,-9.706) M8(8.104,-9.706) M9(8.904,-9.706) N1(2.504,-10.506) N2(3.304,-10.506) N3(4.104,-10.506) N7(7.304,-10.506) N8(8.104,-10.506) N9(8.904,-10.506) P1(2.504,-11.306) P2(3.304,-11.306) P3(4.104,-11.306) P7(7.304,-11.306) P8(8.104,-11.306) P9(8.904,-11.306) R1(2.504,-12.106) R2(3.304,-12.106) R3(4.104,-12.106) R7(7.304,-12.106) R8(8.104,-12.106) R9(8.904,-12.106) T1(2.504,-12.906) T2(3.304,-12.906) T3(4.104,-12.906) T7(7.304,-12.906) T8(8.104,-12.906) T9(8.904,-12.906)
  silkscreen extent -0.2,-14.01 10.8,0.2
HDR2X12_CEN [mm] "Connector; Header; 12x2 Position"
  rect 1.5x1.5 hole 0.9: 1(0,0)
  round 1.5 hole 0.9: 2(2.54,0) 3(5.08,0) 4(7.62,0) 5(10.16,0) 6(12.7,0) 7(15.24,0) 8(17.78,0) 9(20.32,0) 10(22.86,0) 11(25.4,0) 12(27.94,0) 13(0,2.54) 14(2.54,2.54) 15(5.08,2.54) 16(7.62,2.54) 17(10.16,2.54) 18(12.7,2.54) 19(15.24,2.54) 20(17.78,2.54) 21(20.32,2.54) 22(22.86,2.54) 23(25.4,2.54) 24(27.94,2.54)
  silkscreen extent -1.27,-1.27 29.21,3.81
HR911130C [mil]
  round 66.93 hole 43.31: 11(260,272.62) 12(160,272.62) 13(-160,272.62) 14(-260,272.62)
  rect 60x60 hole 35.83: P1(229.63,-272.62)
  round 60 hole 35.83: P2(179.1,-172.38) P3(125.2,-272.38) P4(79.1,-172.38) P5(25.2,-272.38) P6(-20.9,-172.38) P7(-74.8,-272.38) P8(-120.9,-172.38) P9(-174.8,-272.38) P10(-220.9,-172.38)
  round 85 hole 65: SHIELD0(-315,-42.48) SHIELD1(315,-42.48)
  round 127.95 hole 127.95 unplated: ""(-224.4,77.62) ""(224.4,77.62)
  silkscreen extent -315,-347 315,503
L1008 [mil]
  rect 33.5x98.4 smd: 1(-39.92,0) 2(40.08,0)
  silkscreen extent -31,-39 31,39
LC-0402_C [mm]
  rect 0.6x0.65 smd mask+0.051: 1(-0.425,0) 2(0.425,0)
  silkscreen extent -0.97,-0.58 0.98,0.58, body extent -0.48,-0.3 0.52,0.3, height 0.2
LC-0402_R [mm]
  rect 0.6x0.65 smd mask+0.051: 1(-0.425,0) 2(0.425,0)
  silkscreen extent -0.97,-0.58 0.97,0.58, body extent -0.57,-0.27 0.58,0.28, height 0.41
LC-0603_L [mm]
  oval 0.93x0.98 smd: 1(-0.77,0) 2(0.77,0)
  silkscreen extent -1.53,-0.79 1.54,0.79, body extent -0.8,-0.41 0.8,0.41, height 0.46
LC-0805_C [mm]
  rect 1.16x1.47 smd: 1(-0.89,0) 2(0.89,0)
  silkscreen extent -1.77,-1.04 1.77,1.04
LC-QFN-32_5x5x05P [mm]
  rect 3.5x3.5 smd paste-1.75 mask+0.051: 0(0,0)
  oval 0.28x0.9 smd mask+0.051: 1(-1.75,-2.55) 2(-1.25,-2.55) 3(-0.75,-2.55) 4(-0.25,-2.55) 5(0.25,-2.55) 6(0.75,-2.55) 7(1.25,-2.55) 8(1.75,-2.55) 17(1.75,2.55) 18(1.25,2.55) 19(0.75,2.55) 20(0.25,2.55) 21(-0.25,2.55) 22(-0.75,2.55) 23(-1.25,2.55) 24(-1.75,2.55)
  oval 0.9x0.28 smd mask+0.051: 9(2.55,-1.75) 10(2.55,-1.25) 11(2.55,-0.75) 12(2.55,-0.25) 13(2.55,0.25) 14(2.55,0.75) 15(2.55,1.25) 16(2.55,1.75) 25(-2.55,1.75) 26(-2.55,1.25) 27(-2.55,0.75) 28(-2.55,0.25) 29(-2.55,-0.25) 30(-2.55,-0.75) 31(-2.55,-1.25) 32(-2.55,-1.75)
  silkscreen extent -2.7,-3.35 2.7,2.7
LC-QFN-48_6x6x04P [mm]
  rect 4.2x4.2 smd mask+0.051: 0(0,0)
  oval 0.22x1 smd mask+0.051: 1(-2.2,-2.9) 2(-1.8,-2.9) 3(-1.4,-2.9) 4(-1,-2.9) 5(-0.6,-2.9) 6(-0.2,-2.9) 7(0.2,-2.9) 8(0.6,-2.9) 9(1,-2.9) 10(1.4,-2.9) 11(1.8,-2.9) 12(2.2,-2.9) 25(2.2,2.9) 26(1.8,2.9) 27(1.4,2.9) 28(1,2.9) 29(0.6,2.9) 30(0.2,2.9) 31(-0.2,2.9) 32(-0.6,2.9) 33(-1,2.9) 34(-1.4,2.9) 35(-1.8,2.9) 36(-2.2,2.9)
  oval 1x0.22 smd mask+0.051: 13(2.9,-2.2) 14(2.9,-1.8) 15(2.9,-1.4) 16(2.9,-1) 17(2.9,-0.6) 18(2.9,-0.2) 19(2.9,0.2) 20(2.9,0.6) 21(2.9,1) 22(2.9,1.4) 23(2.9,1.8) 24(2.9,2.2) 37(-2.9,2.2) 38(-2.9,1.8) 39(-2.9,1.4) 40(-2.9,1) 41(-2.9,0.6) 42(-2.9,0.2) 43(-2.9,-0.2) 44(-2.9,-0.6) 45(-2.9,-1) 46(-2.9,-1.4) 47(-2.9,-1.8) 48(-2.9,-2.2)
  silkscreen extent -3.2,-3.85 3.2,3.2
LC-SMD-5032_2P [mil]
  rect 66.92x94.48 smd: 1(-77.18,0.02) 2(77.18,-0.02)
  silkscreen extent -99,-66 98,61
"micro usb" [mm]
  rect 0.4x2 smd: 1(1.145,0.066) 2(1.795,0.066) 3(2.445,0.066) 4(3.095,0.066) 5(3.745,0.066)
  round 1.3 hole 0.7: 6(4.87,0.074) 9(0.02,0.074)
  oval 1.3x2.199 hole 0.7 slot 1.5 at 90 deg: 7(6.045,-2.597) 8(-1.155,-2.597)
  silkscreen extent -1.55,-5.33 6.45,0.42
MLP8 [mil]
  rect 43.3x19.7 smd: 1(-138.85,75) 2(-138.85,25) 3(-138.85,-25) 4(-138.85,-75) 5(176.15,-75) 6(176.15,-25) 7(176.15,25) 8(176.15,75)
  silkscreen extent -165,-118 176,118
NMOS [mil]
  rect 36x36 smd: 1(80,-39) 2(80,36)
  rect 50x36 smd: 3(0,-1)
  silkscreen extent -5,-59 85,56
OSC-SMD_4P-L3.2-W2.5-BL [mm]
  rect 0.5x0.5 smd: 1(-2.454,-1.371)
  rect 1.4x1.15 smd: 2(-0.254,-1.371) 3(-0.254,0.229) 4(-2.454,0.229)
  Top Layer region: -3.154,-0.796 -2.116,-0.796 -1.754,-1.175 -1.754,-1.946 -3.154,-1.946
  silkscreen extent -3.45,-2.92 0.75,1.13
TCM811TERCTR [mil]
  rect 12x30 smd: 1(-36,-41.3) 2(39,-41.3) 3(39,41.3) 4(-36,41.3)
  silkscreen extent -56,-81 56,66
TF [mm]
  rect 1.4x1.6 smd: 0(-4.55,6.85)
  rect 1.6x0.7 smd: 1(-5.05,2.25) 2(-5.05,1.15) 3(-5.05,0.05) 4(-5.05,-1.05) 5(-5.05,-2.15) 6(-5.05,-3.25) 7(-5.05,-4.35) 8(-5.05,-5.45) 9(-5.05,-6.55)
  rect 1.4x1.2 smd: 10(-4.55,-7.75)
  rect 2.2x1.2 smd: 11(5.05,-7.75) 12(5.05,7.75)
  silkscreen extent -4.06,-7.29 9.47,7.15
TLV62130RGT [mil]
  oval 11x33.5 smd: 1(-29.5,-58.6) 2(-9.8,-58.6) 3(9.8,-58.6) 4(29.5,-58.6) 9(29.5,57.6) 10(9.8,57.6) 11(-9.8,57.6) 12(-29.5,57.6)
  oval 33.5x11 smd: 5(58.1,-30) 6(58.1,-10.3) 7(58.1,9.3) 8(58.1,29) 13(-58.1,29) 14(-58.1,9.3) 15(-58.1,-10.3) 16(-58.1,-30)
  rect 66.9x66.9 smd: 20(0,-0.5)
  silkscreen extent -59,-94 59,59
TPS7A8101 [mm]
  rect 1.5x2.8 smd: 0(0,0)
  rect 0.6x0.3 smd: 1(-1.5,0.975) 2(-1.5,0.325) 3(-1.5,-0.325) 4(-1.5,-0.975) 5(1.5,-0.975) 6(1.5,-0.325) 7(1.5,0.325) 8(1.5,0.975)
  silkscreen extent -1.6,-1.6 1.6,1.6, body extent -1.5,-1.5 1.5,1.5, height 0.6
TPS2051BDBVR [mm]
  rect 1x0.55 smd: 1(1.087,-0.95) 2(1.087,0) 3(1.087,0.95) 4(-1.913,0.95) 5(-1.913,-0.95)
  silkscreen extent -1.31,-1.78 1.24,1.55
TSML150W160H160 [mil]
  rect 30x65 smd: 1(-50,62.51) 2(0,62.51) 3(50,62.51) 4(50,-62.49) 5(0,-62.49) 6(-50,-62.49)
  silkscreen extent -130,-110 90,110, body extent -90,-110 90,110, height 150
TXS02612RTWR [mil]
  rect 33.4x11.8 smd: 1(-79.76,52.7) 2(-79.76,33) 3(-79.76,13.3) 4(-79.76,-6.4) 5(-79.76,-26) 6(-79.76,-45.7) 13(73.74,-45.7) 14(73.74,-26) 15(73.74,-6.4) 16(73.74,13.3) 17(73.74,33) 18(73.74,52.7)
  rect 11.8x33.4 smd: 7(-52.15,-73.3) 8(-32.56,-73.3) 9(-12.85,-73.3) 10(6.85,-73.3) 11(26.55,-73.3) 12(46.24,-73.3) 19(46.24,80.3) 20(26.55,80.3) 21(6.85,80.3) 22(-12.85,80.3) 23(-32.56,80.3) 24(-52.15,80.3)
  rect 98.4x98.4 smd: 25(-2.76,3.7)
  silkscreen extent -110,-81 82,88
W25Q256 [mm]
  rect 0.5x1 smd: 1(-1.92,-3.8) 2(-0.64,-3.8) 3(0.64,-3.8) 4(1.92,-3.8) 5(1.92,3.8) 6(0.64,3.8) 7(-0.64,3.8) 8(-1.92,3.8)
  rect 4.3x3.4 smd: 9(0,0)
  silkscreen extent -3,-4.7 3,4
开关 [mm]
  rect 1.2x2 smd: 1(-2.321,-0.024) 2(2.179,-0.024)
  silkscreen extent -2.07,-1.52 1.93,1.48

## Part data
C1: library part CAP, "Capacitor"
C2 C3 C4 C5 C6 C7 C8 C9 C10 C11 C12 C13 C17 C18 C19 C20 C21 C22 C23 C24 C25 C26 C27 C28 C33 C34 C35 C36 C37 C38 C39 C41 C42 C43 C44 C45 C46 C49 C50 C51 C52 C53 C54 C55 C56 C57 C61 C62 C67 C68 C69 C70 C71 C72 C73 C74 C75 C76 C77 C78 C80 C81 C82 C83 C84 C85 C86 C87 C89 C90 C91 C92 C93 C94 C95 C96 C98 C99 C100 C101 C102 C103 C104 C105 C106 C107 C108: library part CAP_3, "Capacitor"
C14 C15 C16 C29 C30 C31 C32 C40 C47 C48 C117 C118 C122 C123 C145 C146 C150 C151 C152 C162 C165 C166 C168 C169 C170 C171 C172 C173 C174 C175 C176 C177 CP1 CP3: library part CAP_1, "Capacitor"
C58 C59 C60 C63 C109 C110 C111 C112 C113 C114 C115 C116 C119 C120 C121 C124 C125 C126 C127 C128 C129 C130 C131 C132 C133 C134 C135 C136 C137 C138 C139 C140 C141 C142 C143 C144 CP2: library part CAP_2, "Capacitor"
DONE USR_LED: library part LED0, "Typical INFRARED GaAs LED", LatestRevisionDate=08-Jul-2005, LatestRevisionNote="Mech Layer 1 removed.", PackageDescription="LED; 2 Leads", PackageReference=LED-0, Published=8-Jun-2000, Publisher="Altium Limited"
L1 L2 L3 L4 L6: library part INDUCTANCE_1, "Inductance"
L5 L7 L8 L9 LP1: library part INDUCTANCE, "Inductance"
LG1: BOM_Manufacturer=HANRUN, BOM_Manufacturer Part=HR911130C, BOM_Supplier=LCSC, BOM_Supplier Part=C50933, Contributor=LCSC, nameAlias=Value, spicePre=L, spiceSymbolName=HR911130C
P2: "Header, 12-Pin, Dual row", LatestRevisionDate=17-Jul-2002, LatestRevisionNote="Re-released for DXP Platform.", Publisher="Altium Limited"
Q1 Q2: PSpiceTemplate="X^@REFDES %d %g %s @MODEL"
R1 R2 R3 R4 R5 R6 R7 R8 R9 R10 R11 R12 R13 R14 R15 R16 R17 R18 R19 R21 R22 R24 R25 R26 R27 R28 R29 R30 R31 R32 R33 R34 R35 R36 R37 R38 R39 R40 R41 R42 R43 R44 R45 R46 R47 R48 R49 R50 R51 R52 R53 R54 R55 R56 R57 R58 R59 R60 R61 R62 R63 R64 R65 R66 R67 R68 R69 R70 R71 R72: library part RES, "Resistor"
R73 R74 R75 RP1 RP2 RX2 RX3 RX4 RX5 RX6 RX7 RX8 RX9 RX10 RX11 RX12: library part RES_1, "Resistor"
RESET USR_BTN: "Switch", LatestRevisionDate=17-Jul-2002, LatestRevisionNote="Re-released for DXP Platform.", PackageDescription="Switch; 2 Leads", PackageReference=SPST-2, Published=24-Mar-1999, Publisher="Altium Limited"
U2: library part DDR3
U14: library part N25Q12-F8, "Serial Flash Memory, 16Mbit, Low Voltage, 50MHz SPI Bus Interface", Manufacturer=Spansion
X1 X3: library part XTAL-2, "Crystal"
X2 X4: library part XTAL-4, "Oscillator"

## Via types
v1: diameter 19.68, hole 11.81, Top Layer to Bottom Layer, 16 vias

## Nets (pads, with @x,y where several pads share a name; then routed paths per layer and width w, separated by ;. In a path a pad name is that pad's centre, name@x,y a point inside that pad or via, vN(x,y) a via of type N, cw(c..) or ccw(c..) an arc to the next point about the centre after c; other vN are vias at no path point)
1_N: C16.1 C29.1 T1.6 T2.6
1_P: C30.1 C31.1 T1.4 T2.4
1P3_TX1A: C58.1 C59.2 C60.1 C63.2 L5.1 L7.1 L8.1 L9.1
2_N: C32.2 C40.2 T3.4 T4.4
2_P: C47.2 C48.2 T3.6 T4.6
AD9361_CLKOUT: U1.H17 U5.J6
AD9361_RST: RX4.1 U1.H16 U5.K5
ADVDD10: C124.1 C125.1 C126.1 C127.2 C128.2 C130.2 C131.2 L6.2 U3.3 U3.9 U3.28 U3.36 U3.40
CB: *.6 R58.1 U14.6
CTRL_IN0: U1.Y16 U5.C5
CTRL_IN1: U1.Y17 U5.C6
CTRL_IN2: U1.Y18 U5.D6
CTRL_IN3: U1.V16 U5.D5
CTRL_OUT0: U1.W13 U5.D4
CTRL_OUT1: U1.Y14 U5.E4
CTRL_OUT2: U1.W14 U5.E5
CTRL_OUT3: U1.W16 U5.E6
CTRL_OUT4: U1.Y19 U5.F6
CTRL_OUT5: U1.V13 U5.F5
CTRL_OUT6: U1.U14 U5.F4
CTRL_OUT7: U1.J16 U5.G4
DATA_CLK_N: U1.H20 U5.H11
DATA_CLK_P: U1.J20 U5.G11
DDR3_A0: U1.N2 U2.N3
DDR3_A1: U1.K2 U2.P7
DDR3_A2: U1.M3 U2.P3
DDR3_A3: U1.K3 U2.N2
DDR3_A4: U1.M4 U2.P8
DDR3_A5: U1.L1 U2.P2
DDR3_A6: U1.L4 U2.R8
DDR3_A7: U1.K4 U2.R2
DDR3_A8: U1.K1 U2.T8
DDR3_A9: U1.J4 U2.R3
DDR3_A10: U1.F5 U2.L7
DDR3_A11: U1.G4 U2.R7
DDR3_A12: U1.E4 U2.N7
DDR3_A13: U1.D4 U2.T3
DDR3_A14: U1.F4 U2.T7
DDR3_BA0: U1.L5 U2.M2
DDR3_BA1: U1.R4 U2.N8
DDR3_BA2: U1.J5 U2.M3
DDR3_CAS: U1.P5 U2.K3
DDR3_CK_N: U1.M2 U2.K7
DDR3_CK_P: U1.L2 U2.J7
DDR3_CKE: U1.N3 U2.K9
DDR3_CS: U1.N1 U2.L2
DDR3_DM0: U1.A1 U2.E7
DDR3_DM1: U1.F1 U2.D3
DDR3_DQ0: U1.C3 U2.E3
DDR3_DQ1: U1.B3 U2.F7
DDR3_DQ2: U1.A2 U2.F2
DDR3_DQ3: U1.A4 U2.F8
DDR3_DQ4: U1.D3 U2.H3
DDR3_DQ5: U1.D1 U2.H8
DDR3_DQ6: U1.C1 U2.G2
DDR3_DQ7: U1.E1 U2.H7
DDR3_DQ8: U1.E2 U2.D7
DDR3_DQ9: U1.E3 U2.C3
DDR3_DQ10: U1.G3 U2.C8
DDR3_DQ11: U1.H3 U2.C2
DDR3_DQ12: U1.J3 U2.A7
DDR3_DQ13: U1.H2 U2.A2
DDR3_DQ14: U1.H1 U2.B8
DDR3_DQ15: U1.J1 U2.A3
DDR3_DQS0_N: U1.B2 U2.G3
DDR3_DQS0_P: U1.C2 U2.F3
DDR3_DQS1_N: U1.F2 U2.B7
DDR3_DQS1_P: U1.G2 U2.C7
DDR3_ODT: U1.N5 U2.K1
DDR3_RAS: U1.P4 U2.J3
DDR3_RESET: R1.1 U1.B4 U2.T2
DDR3_VREF: C1.1 R4.1 R5.2 U1.H6 U1.P6 U2.H1 U2.M8
DDR3_WE: U1.M5 U2.L3
EN_AGC: U1.K16 U5.G5
ENABLE: U1.E17 U5.G6
ETH_MDC: U1.C10 U3.30
ETH_MDIO: R34.2 U1.C11 U3.31
ETH_RXCK: U1.B17 U3.19
ETH_RXCTL: R36.2 U1.D13 U3.13
ETH_RXD0: R41.1 U1.D11 U3.14
ETH_RXD1: R39.1 U1.A16 U3.16
ETH_RXD2: R43.1 U1.F15 U3.17
ETH_RXD3: R45.1 U1.A15 U3.18
ETH_TXCK: U1.A19 U3.22
ETH_TXCTL: U1.F14 U3.27
ETH_TXD0: U1.E14 U3.23
ETH_TXD1: U1.B18 U3.24
ETH_TXD2: U1.D10 U3.25
ETH_TXD3: U1.A17 U3.26
FB_CLK_N: RX3.1 U1.J19
FB_CLK_P: RX9.1 U1.K19
FB_N: RX2.2 RX3.2 U5.G10
FB_P: RX9.2 U5.F10
FPGA_DONE: Q1.1 U1.R11
FPGA_TCK: P2.10 U1.F9
FPGA_TDI: P2.8 U1.G6
FPGA_TDO: P2.7 U1.F6
FPGA_TMS: P2.9 U1.J6
GND: *.4 *.9 C1.2 C2.1 C3.1 C4.1 C5.1 C6.1 C7.1 C8.1 C9.1 C10.1 C11.1 C12.1 C13.1 C33.1 C34.1 C35.1 C36.1 C37.1 C38.1 C39.1 C41.1 C42.1 C43.1 C44.1 C45.1 C46.1 C49.1 C50.1 C51.1 C52.1 C53.1 C54.1 C55.1 C56.1 C57.1 C61.1 C62.1 C67.1 C68.1 C69.1 C70.1 C71.1 C72.1 C73.1 C74.1 C75.1 C76.1 C77.1 C78.1 C80.1 C81.2 C82.1 C83.1 C84.1 C85.1 C86.1 C87.1 C89.1 C90.1 C91.1 C92.1 C93.1 C94.1 C95.1 C96.1 C98.2 C99.2 C100.2 C101.2 C102.2 C103.2 C104.2 C105.2 C106.2 C107.2 C108.2 C109.1 C110.1 C111.2 C112.2 C113.1 C114.1 C115.1 C116.1 C117.2 C118.2 C119.1 C120.2 C121.1 C122.2 C123.2 C124.2 C125.2 C126.2 C127.1 C128.1 C129.2 C130.1 C131.1 C132.2 C133.2 C134.2 C135.2 C136.2 C137.2 C138.2 C139.2 C140.1 C141.2 J2.5 J2.6 J2.7 J2.8 J2.9 LG1.12 LG1.P10 LG1.SHIELD0 LG1.SHIELD1 P2.3 P2.5 P2.18 P2.19 P2.20 P2.21 P2.22 P2.23 P2.24 Q1.2 Q2.2 R1.2 R3.1 R5.1 R6.2 R11.2 R12.2 R17.2 R18.2 R26.2 R28.2 R36.1 R40.1 R44.2 R49.1 R51.1 R53.1 R54.2 R56.1 R62.1 R65.2 R69.2 RESET.1 RX6.2 RX7.2 RX8.2 tf1.6 tf1.10 TU1.2 U1.A8 U1.A18 U1.B1 U1.B11 U1.C4 U1.C9 U1.C14 U1.D17 U1.E10 U1.E20 U1.F3 U1.F7 U1.F10 U1.G10 U1.G12 U1.G16 U1.H7 U1.H9 U1.H11 U1.H13 U1.H19 U1.J2 U1.J8 U1.J10 U1.J12 U1.K5 U1.K7 U1.K10 U1.K11 U1.K13 U1.K15 U1.L8 U1.L9 U1.L12 U1.L18 U1.M1 U1.M7 U1.M9 U1.M10 U1.M11 U1.M13 U1.N4 U1.N8 U1.N10 U1.N12 U1.N14 U1.P7 U1.P9 U1.P11 U1.P13 U1.P17 U1.R8 U1.R12 U1.R20 U1.T3 U1.T7 U1.T13 U1.U6 U1.U16 U1.V9 U1.V19 U1.W2 U1.W12 U1.Y5 U1.Y15 U2.A9 U2.B1 U2.B3 U2.B9 U2.D1 U2.D8 U2.E1 U2.E2 U2.E8 U2.F9 U2.G1 U2.G8 U2.G9 U2.J2 U2.J8 U2.M1 U2.M9 U2.P1 U2.P9 U2.T1 U2.T9 U3.0 U3.47 U4.0 U6.6 U6.7 U6.8 U6.15 U6.16 U6.20 U7.6 U7.7 U7.8 U7.15 U7.16 U7.20 U8.6 U8.7 U8.8 U8.15 U8.16 U8.20 U9.6 U9.7 U9.8 U9.15 U9.16 U9.20 U13.1 U14.4 USD1.2 USD1.11 USD1.25 USR_BTN.1 X2.2
NetC6_2: C6.2 U6.9
NetC7_2: C7.2 U7.9
NetC11_2: C11.2 U8.9
NetC13_2: C13.2 U9.9
NetC19_1: C19.1 R21.2 R24.1 U11.3
NetC24_1: C24.1 R22.2 R25.1 U12.3
NetC27_2: C27.2 U11.6
NetC28_2: C28.2 U12.6
NetC111_1: C111.1 C112.1 LG1.P1
NetC117_1: C117.1 U3.43 X1.1
NetC118_1: C118.1 U3.42 X1.2
NetC119_2: C119.2 R28.1 R29.1 U1.E11
NetC122_1: C122.1 U4.26 X3.1
NetC123_1: C123.1 U4.25 X3.2
NetC129_1: C129.1 U4.20
NetC135_1: C135.1 C136.1 R64.1
NetC142_1: C142.1 R73.2
NetC145_2: C145.2 R74.1
NetC146_2: C146.2 R73.1 U5.G2 U5.G3
NetC150_2: C150.2 C152.1 U5.M12
NetC151_2: C151.2 R74.2 U5.A11 U5.B11
NetC152_2: C152.2 X4.3
NetCP2_2: CP2.2 RP1.1 RP2.2 UP1.6
NetDONE_2: DONE.2 R61.2
NetL1_1: L1.1 U6.1 U6.2 U6.3
NetL2_1: L2.1 U7.1 U7.2 U7.3
NetL3_1: L3.1 U8.1 U8.2 U8.3
NetL4_1: L4.1 U9.1 U9.2 U9.3
NetLG1_11: LG1.11 R32.2
NetLG1_13: LG1.13 R31.2
NetLP1_1: LP1.1 UP1.3
NetP2_2: P2.2 R52.1 R54.1
NetP2_4: P2.4 R48.2 R50.1
NetQ1_3: Q1.3 R61.1
NetQ2_3: Q2.3 R60.1
NetR2_2: R2.2 U1.H5
NetR3_2: R3.2 U1.G5
NetR6_1: R6.1 U2.L8
NetR9_2: R9.2 R11.1 U6.5
NetR10_2: R10.2 R12.1 U7.5
NetR14_2: R14.2 R17.1 U8.5
NetR15_2: R15.2 U9.4
NetR16_2: R16.2 R18.1 U9.5
NetR26_1: R26.1 U3.39
NetR27_1: R27.1 U3.32
NetR30_2: R30.2 U1.B10
NetR37_2: R37.2 X2.3
NetR38_2: R38.2 U3.20
NetR42_2: R42.2 U4.1
NetR44_1: R44.1 U4.24
NetR55_2: R55.2 U1.R10
NetR57_2: R57.2 U1.L6
NetR60_2: R60.2 USR_LED.2
NetR62_2: R62.2 USD1.24
NetR63_2: R63.2 tf1.3 USD1.20
NetR67_2: R67.2 TU1.1
NetR68_1: R68.1 TU1.3
NetR70_1: R70.1 tf1.9
NetR72_1: R72.1 USD1.9
NetR75_1: R75.1 U5.L4
NetRESET_2: RESET.2 U13.3
NetRX1_1: RX1.1 T1.3
NetRX13_1: RX13.1 T2.3
NetT3_3: T3.3 TX1.1
NetT4_3: T4.3 TX2.1
Nettf1_1: tf1.1 USD1.23
Nettf1_2: tf1.2 USD1.22
Nettf1_5: tf1.5 USD1.19
Nettf1_7: tf1.7 USD1.18
Nettf1_8: tf1.8 USD1.16
OTG_CLK: R42.1 U1.A11
OTG_DATA0: U1.A14 U4.3
OTG_DATA1: U1.D15 U4.4
OTG_DATA2: U1.A12 U4.5
OTG_DATA3: U1.F12 U4.6
OTG_DATA4: U1.C16 U4.7
OTG_DATA5: U1.A10 U4.9
OTG_DATA6: U1.E13 U4.10
OTG_DATA7: U1.C18 U4.13
OTG_DIR: U1.C13 U4.31
OTG_NXT: U1.E16 U4.2
OTG_RESETN: C121.2 R33.1 U1.D16 U4.27
OTG_STP: U1.C15 U4.29
PG_1V0: R7.2 U6.4 U7.13
PG_1V5: R13.2 U8.4 U9.13
PG_1V8: R8.2 U7.4 U8.13
PHY_AD0/LED0: R31.1 R46.2 U3.35
PHY_AD1/LED1: R32.1 R40.2 U3.34
PHY_MDI0_N: LG1.P3 U3.2
PHY_MDI0_P: LG1.P2 U3.1
PHY_MDI1_N: LG1.P7 U3.5
PHY_MDI1_P: LG1.P4 U3.4
PHY_MDI2_N: LG1.P6 U3.8
PHY_MDI2_P: LG1.P5 U3.7
PHY_MDI3_N: LG1.P9 U3.11
PHY_MDI3_P: LG1.P8 U3.10
PMEB: R35.2 U3.33
PS_CLK_500: R37.1 U1.E7
PS_MIO7: R56.2 U1.D8
PS_MIO8: R47.2 U1.D5
PS_PRO_B: U1.C7 U3.29 U13.2
QSPI_CS: *.1 R59.1 U1.A7 U14.1
QSPI_D0: *.5 R49.2 U1.B8 U14.5
QSPI_D1: *.2 R51.2 U1.D6 U14.2
QSPI_D2: *.3 R52.2 U1.B7 U14.3
QSPI_D3: *.7 R50.2 U1.A6 U14.7
QSPI_SCK: R53.2 R58.2 U1.A5
REG_OUT: L6.1 U3.48
RFGND: C14.2 C15.2 C17.1 C18.1 C20.1 C21.1 C22.1 C23.1 C25.1 C26.1 C27.1 C28.1 C58.2 C59.1 C60.2 C63.1 C142.2 C143.1 C144.1 C145.1 C146.1 C150.1 C151.1 C162.2 C165.2 C166.2 C168.2 C169.2 C170.2 C171.2 C172.2 C173.2 C174.2 C175.2 C176.2 C177.2 CP1.1 CP3.1 R24.2 R25.2 R75.2 RP1.2 RX1.2 RX1.3 RX1.4 RX1.5 RX2.1 RX5.1 RX6.1 RX7.1 RX8.1 RX10.1 RX13.2 RX13.3 RX13.4 RX13.5 T1.1 T1.2 T1.5 T2.1 T2.2 T2.5 T3.1 T3.2 T3.5 T4.1 T4.2 T4.5 TX1.2 TX1.3 TX1.4 TX1.5 TX2.2 TX2.3 TX2.4 TX2.5 U5.A1 U5.A2 U5.A4 U5.A5 U5.A6 U5.A12 U5.B1 U5.B2 U5.B12 U5.C1 U5.C2 U5.C7 U5.C8 U5.C9 U5.C10 U5.C11 U5.C12 U5.D1 U5.D12 U5.E1 U5.F1 U5.F3 U5.F7 U5.F9 U5.F11 U5.G1 U5.G12 U5.H2 U5.H3 U5.H5 U5.H6 U5.H7 U5.H10 U5.J2 U5.K1 U5.K2 U5.K12 U5.L1 U5.L2 U5.L3 U5.L7 U5.L8 U5.L9 U5.L10 U5.L11 U5.L12 U5.M4 U5.M5 U5.M6 U11.0 U11.4 U12.0 U12.4 UP1.2 X4.2
  other v1: 10727.2,5306.61 10752.8,5306.61 10927.2,5306.61 10952.8,5306.61 10727.2,5332.2 10752.8,5332.2 10927.2,5332.2 10952.8,5332.2 10727.2,5357.8 10752.8,5357.8 10927.2,5357.8 10952.8,5357.8 10727.2,5383.39 10752.8,5383.39 10927.2,5383.39 10952.8,5383.39
RX1A_N: C16.2 C29.2 U5.M2
RX1A_P: C30.2 C31.2 U5.M1
RX1B_N: U5.J1
RX1B_P: U5.H1
RX_D0_N: U1.G20 U5.K11
RX_D0_P: U1.G19 U5.J12
RX_D1_N: U1.F20 U5.K10
RX_D1_P: U1.F19 U5.J11
RX_D2_N: U1.E19 U5.K9
RX_D2_P: U1.E18 U5.J10
RX_D3_N: U1.D20 U5.K8
RX_D3_P: U1.D19 U5.J9
RX_D4_N: U1.B20 U5.K7
RX_D4_P: U1.C20 U5.J8
RX_D5_N: U1.A20 U5.J7
RX_D5_P: U1.B19 U5.H8
RX_FRAME_N: U1.K18 U5.G7
RX_FRAME_P: U1.K17 U5.G8
SD_CD: R70.2 R71.1 U1.B14
SD_CLK: R72.2 U1.D14
SD_CMD: U1.C17 USD1.4
SD_D0: U1.E12 USD1.6
SD_D1: U1.A9 USD1.7
SD_D2: U1.F13 USD1.1
SD_D3: U1.B15 USD1.3
SPI_CLK: U1.L16 U5.J5
SPI_DI: U1.L17 U5.J4
SPI_DO: U1.G17 U5.L6
SPI_ENB: U1.D18 U5.K6
TEST/ENABLE: RX5.2 U1.V15 U5.C4
TX1A_N: C47.1 C48.1 L7.2 L9.2 U5.M8
TX1A_P: C32.1 C40.1 L5.2 L8.2 U5.M7
TX1B_N: U5.M10
TX1B_P: U5.M9
TX_D0_N: U1.U19 U5.E7
TX_D0_P: U1.U18 U5.F8
TX_D1_N: U1.W20 U5.D7
TX_D1_P: U1.V20 U5.E8
TX_D2_N: U1.P20 U5.D8
TX_D2_P: U1.N20 U5.E9
TX_D3_N: U1.U20 U5.D9
TX_D3_P: U1.T20 U5.E10
TX_D4_N: U1.M20 U5.D10
TX_D4_P: U1.M19 U5.E11
TX_D5_N: U1.L20 U5.D11
TX_D5_P: U1.L19 U5.E12
TX_FRAME_N: RX11.1 U1.H18
TX_FRAME_P: RX12.1 U1.J18
TXF_N: RX10.2 RX11.2 U5.H9
TXF_P: RX12.2 U5.G9
TXNRX: U1.F17 U5.H4
UART_RX: P2.11 U1.C12
UART_TX: P2.12 U1.B12
USB2_5V: C137.1 J2.1 P2.15 R64.2 R66.1 R67.1
USB_ID: J2.4 U4.23
USB_OTG_N: J2.2 P2.16 U4.19
USB_OTG_P: J2.3 P2.17 U4.18
USB_VBUS: R66.2 U4.22
USR_BTN: R19.2 U1.C5 USR_BTN.2
USR_LED: Q2.1 R65.1 U1.C8
VCC1P8: C143.2 C144.2 CP2.1 CP3.2 LP1.2 RP2.1 U5.H12 X4.4
VCC_1V0: C2.2 C33.2 C34.2 C35.2 C36.2 C37.2 C39.2 C49.2 C50.2 C51.2 C52.2 C53.2 C54.2 C55.2 C56.2 C57.2 C67.2 L1.2 R7.1 R9.1 U1.G7 U1.G11 U1.G13 U1.H10 U1.H12 U1.J7 U1.J13 U1.K12 U1.L7 U1.L13 U1.M12 U1.N7 U1.N13 U1.P8 U1.P12 U1.R7 U1.R13 U6.14
VCC_1V5: C8.2 C38.2 C81.1 C86.2 C98.1 C99.1 C100.1 C101.1 C102.1 C103.1 C104.1 C105.1 C106.1 C107.1 C108.1 L3.2 R2.1 R4.2 R13.1 R14.1 U1.A3 U1.D2 U1.E5 U1.G1 U1.H4 U1.L3 U1.P2 U1.R5 U1.U1 U1.V4 U2.A1 U2.A8 U2.B2 U2.C1 U2.C9 U2.D2 U2.D9 U2.E9 U2.F1 U2.G7 U2.H2 U2.H9 U2.K2 U2.K8 U2.N1 U2.N9 U2.R1 U2.R9 U8.14
VCC_1V8: C3.2 C41.2 C42.2 C43.2 C44.2 C45.2 C46.2 C68.2 C69.2 C70.2 C71.2 C72.2 C73.2 C74.2 C80.2 C82.2 C83.2 C84.2 C85.2 C90.2 C91.2 C92.2 C93.2 C94.2 C95.2 C96.2 C109.2 C110.2 C141.1 L2.2 R8.1 R10.1 R29.2 R30.1 R33.2 R34.1 R39.2 R41.2 R43.2 R45.2 R71.2 U1.A13 U1.B16 U1.C19 U1.D12 U1.E15 U1.F8 U1.F11 U1.F18 U1.G8 U1.G9 U1.H8 U1.H14 U1.J9 U1.J11 U1.J17 U1.K8 U1.K20 U1.L11 U1.M8 U1.M16 U1.N9 U1.N11 U1.N19 U1.P10 U1.R9 U1.R15 U1.T8 U1.T18 U1.U11 U1.V14 U1.W7 U1.W17 U1.Y10 U1.Y20 U3.15 U3.21 U4.8 U4.11 U4.14 U4.28 U4.30 U4.32 U7.14 USD1.5
VCC_3V3: *.8 C9.2 C20.2 C21.2 C25.2 C26.2 C61.2 C62.2 C75.2 C76.2 C77.2 C78.2 C87.2 C89.2 C113.2 C114.2 C115.2 C116.2 C120.1 C132.1 C133.1 C134.1 C138.1 C139.1 CP1.2 DONE.1 L4.2 LG1.14 P2.1 P2.6 R15.1 R16.1 R19.1 R27.2 R35.1 R38.1 R46.1 R47.1 R48.1 R55.1 R57.1 R59.2 R63.1 R68.2 tf1.4 U1.B6 U1.D7 U1.K6 U1.M6 U1.N6 U1.R6 U1.T6 U3.6 U3.37 U3.38 U3.41 U3.44 U3.45 U4.21 U9.14 U11.5 U11.7 U11.8 U12.5 U12.7 U12.8 U13.4 U14.8 UP1.1 UP1.4 USD1.17 USD1.21 USR_LED.1 X2.1 X2.4
VCC_IN: C4.2 C5.2 C10.2 C12.2 C140.2 P2.13 P2.14 TU1.5 U6.10 U6.11 U6.12 U6.13 U7.10 U7.11 U7.12 U8.10 U8.11 U8.12 U9.10 U9.11 U9.12
VDD_DIG: C14.1 C15.1 C22.2 C23.2 C24.2 C162.1 C172.1 C173.1 C176.1 C177.1 R22.1 RX4.2 U5.B8 U5.D2 U5.D3 U5.E3 U5.F12 U5.K4 U12.1 U12.2
VDDA_RX_LO: C17.2 C18.2 C19.2 C165.1 C166.1 C168.1 C169.1 C170.1 C171.1 C174.1 C175.1 R21.1 U5.B9 U5.B10 U5.E2 U5.F2 U5.J3 U5.K3 U11.1 U11.2
VUSB_V_EN: R69.1 TU1.4 U4.17
pads on no net: LG1. tf1.0 tf1.11 tf1.12 U1.B5 U1.B9 U1.B13 U1.C6 U1.D9 U1.E6 U1.E8 U1.E9 U1.F16 U1.G14 U1.G15 U1.G18 U1.H15 U1.J14 U1.J15 U1.K9 U1.K14 U1.L10 U1.L14 U1.L15 U1.M14 U1.M15 U1.M17 U1.M18 U1.N15 U1.N16 U1.N17 U1.N18 U1.P1 U1.P3 U1.P14 U1.P15 U1.P16 U1.P18 U1.P19 U1.R1 U1.R2 U1.R3 U1.R14 U1.R16 U1.R17 U1.R18 U1.R19 U1.T1 U1.T2 U1.T4 U1.T5 U1.T9 U1.T10 U1.T11 U1.T12 U1.T14 U1.T15 U1.T16 U1.T17 U1.T19 U1.U2 U1.U3 U1.U4 U1.U5 U1.U7 U1.U8 U1.U9 U1.U10 U1.U12 U1.U13 U1.U15 U1.U17 U1.V1 U1.V2 U1.V3 U1.V5 U1.V6 U1.V7 U1.V8 U1.V10 U1.V11 U1.V12 U1.V17 U1.V18 U1.W1 U1.W3 U1.W4 U1.W5 U1.W6 U1.W8 U1.W9 U1.W10 U1.W11 U1.W15 U1.W18 U1.W19 U1.Y1 U1.Y2 U1.Y3 U1.Y4 U1.Y6 U1.Y7 U1.Y8 U1.Y9 U1.Y11 U1.Y12 U1.Y13 U2.J1 U2.J9 U2.L1 U2.L9 U2.M7 U3.12 U3.46 U4.12 U4.15 U4.16 U5.A3 U5.A7 U5.A8 U5.A9 U5.A10 U5.B3 U5.B4 U5.B5 U5.B6 U5.B7 U5.C3 U5.L5 U5.M3 U5.M11 UP1.5 USD1.8 USD1.10 USD1.12 USD1.13 USD1.14 USD1.15 X4.1

## Text inside footprints (layer, text, board x,y; h text height)
DONE: Top Overlay "+" at 13322,4964.14 h30 r90
P2: Top Overlay "1" at 17910,3715 h30 r90; Top Overlay "13" at 17790,3675 h30 r90; Top Overlay "12" at 17890,4975 h30 r90; Top Overlay "24" at 17790,4975 h30 r90
RX1: Mechanical 37 "2" at 10283.15,5944.52 h30 r90; Mechanical 37 "3" at 10283.15,5944.52 h30 r90; Mechanical 37 "4" at 10623.67,5949.74 h30 r90; Mechanical 37 "5" at 10623.67,5949.74 h30 r90; Mechanical 37 "1" at 10452.67,5948.27 h30 r90; Mechanical 39 "200X95" at 10796.67,6043.5 h30 r90; Mechanical 39 "200X95B" at 10856.67,6059.5 h30 r90; Mechanical 39 "200X90" at 10736.67,6043.5 h30 r90; Mechanical 39 "CNSMARAL687W375H171" at 10126.67,6251.5 h30 r90; Top Component Outline "26JUL16" at 10440,6714.64 h30 r180; Top Component Outline "QA/RGS" at 10440,6662.24 h30 r180; Top Component Outline "25JUL16" at 10440,5894.63 h30 r180; Top Component Outline "ADI/JRBL" at 10440,5867.03 h30 r180; Mechanical 43 "PCB EDGE" at 10800,6421.5 h30 r90; Top Assembly "N/A" at 10440,6005.5 h30 r180; Top Assembly "UPN" at 10440,6044.9 h30 r180
RX13: Mechanical 37 "2" at 11703.15,2332.52 h30 r90; Mechanical 37 "3" at 11703.15,2332.52 h30 r90; Mechanical 37 "4" at 12043.67,2337.74 h30 r90; Mechanical 37 "5" at 12043.67,2337.74 h30 r90; Mechanical 37 "1" at 11872.67,2336.27 h30 r90; Mechanical 39 "200X95" at 12216.67,2431.5 h30 r90; Mechanical 39 "200X95B" at 12276.67,2447.5 h30 r90; Mechanical 39 "200X90" at 12156.67,2431.5 h30 r90; Mechanical 39 "CNSMARAL687W375H171" at 11546.67,2639.5 h30 r90; Top Component Outline "26JUL16" at 11860,3102.64 h30 r180; Top Component Outline "QA/RGS" at 11860,3050.24 h30 r180; Top Component Outline "25JUL16" at 11860,2282.63 h30 r180; Top Component Outline "ADI/JRBL" at 11860,2255.03 h30 r180; Mechanical 43 "PCB EDGE" at 12220,2809.5 h30 r90; Top Assembly "N/A" at 11860,2393.5 h30 r180; Top Assembly "UPN" at 11860,2432.9 h30 r180
T1: Mechanical 37 "3" at 11180,6332.5 h30; Mechanical 37 "6" at 11080,6207.5 h30; Mechanical 37 "4" at 11180,6207.5 h30; Mechanical 37 "1" at 11080,6332.51 h30; Mechanical 37 "5" at 11130,6207.51 h30; Mechanical 37 "2" at 11129.99,6332.51 h30; Mechanical 39 "30X65" at 11130,6165.02 h30; Mechanical 39 "TSML150W160H160" at 11130,6700 h30; Top Component Outline "ADI/JSM" at 10930,6346.81 h30 r90; Top Component Outline "04SEP12" at 10979.99,6346.81 h30 r90; Top Component Outline "QA/REP" at 11304.99,6334.41 h30 r90; Top Component Outline "04SEP12" at 11355,6346.81 h30 r90; Top Assembly "N/A" at 11180,6290.01 h30 r90; Top Assembly "UPN" at 11204.99,6290.01 h30 r90
T2: Mechanical 37 "3" at 8780,6332.5 h30; Mechanical 37 "6" at 8680,6207.5 h30; Mechanical 37 "4" at 8780,6207.5 h30; Mechanical 37 "1" at 8680,6332.51 h30; Mechanical 37 "5" at 8730,6207.51 h30; Mechanical 37 "2" at 8729.99,6332.51 h30; Mechanical 39 "30X65" at 8730,6165.02 h30; Mechanical 39 "TSML150W160H160" at 8730,6700 h30; Top Component Outline "ADI/JSM" at 8530,6346.81 h30 r90; Top Component Outline "04SEP12" at 8579.99,6346.81 h30 r90; Top Component Outline "QA/REP" at 8904.99,6334.41 h30 r90; Top Component Outline "04SEP12" at 8955,6346.81 h30 r90; Top Assembly "N/A" at 8780,6290.01 h30 r90; Top Assembly "UPN" at 8804.99,6290.01 h30 r90
T3: Mechanical 37 "3" at 10837,2716.5 h30; Mechanical 37 "6" at 10737,2591.5 h30; Mechanical 37 "4" at 10837,2591.5 h30; Mechanical 37 "1" at 10737,2716.51 h30; Mechanical 37 "5" at 10787,2591.51 h30; Mechanical 37 "2" at 10786.99,2716.51 h30; Mechanical 39 "30X65" at 10787,2549.02 h30; Mechanical 39 "TSML150W160H160" at 10787,3084 h30; Top Component Outline "ADI/JSM" at 10587,2730.81 h30 r90; Top Component Outline "04SEP12" at 10636.99,2730.81 h30 r90; Top Component Outline "QA/REP" at 10961.99,2718.41 h30 r90; Top Component Outline "04SEP12" at 11012,2730.81 h30 r90; Top Assembly "N/A" at 10837,2674.01 h30 r90; Top Assembly "UPN" at 10861.99,2674.01 h30 r90
T4: Mechanical 37 "3" at 9288,2716.5 h30; Mechanical 37 "6" at 9188,2591.5 h30; Mechanical 37 "4" at 9288,2591.5 h30; Mechanical 37 "1" at 9188,2716.51 h30; Mechanical 37 "5" at 9238,2591.51 h30; Mechanical 37 "2" at 9237.99,2716.51 h30; Mechanical 39 "30X65" at 9238,2549.02 h30; Mechanical 39 "TSML150W160H160" at 9238,3084 h30; Top Component Outline "ADI/JSM" at 9038,2730.81 h30 r90; Top Component Outline "04SEP12" at 9087.99,2730.81 h30 r90; Top Component Outline "QA/REP" at 9412.99,2718.41 h30 r90; Top Component Outline "04SEP12" at 9463,2730.81 h30 r90; Top Assembly "N/A" at 9288,2674.01 h30 r90; Top Assembly "UPN" at 9312.99,2674.01 h30 r90
TX1: Mechanical 37 "2" at 9203.15,5944.52 h30 r90; Mechanical 37 "3" at 9203.15,5944.52 h30 r90; Mechanical 37 "4" at 9543.67,5949.74 h30 r90; Mechanical 37 "5" at 9543.67,5949.74 h30 r90; Mechanical 37 "1" at 9372.67,5948.27 h30 r90; Mechanical 39 "200X95" at 9716.67,6043.5 h30 r90; Mechanical 39 "200X95B" at 9776.67,6059.5 h30 r90; Mechanical 39 "200X90" at 9656.67,6043.5 h30 r90; Mechanical 39 "CNSMARAL687W375H171" at 9046.67,6251.5 h30 r90; Top Component Outline "26JUL16" at 9360,6714.64 h30 r180; Top Component Outline "QA/RGS" at 9360,6662.24 h30 r180; Top Component Outline "25JUL16" at 9360,5894.63 h30 r180; Top Component Outline "ADI/JRBL" at 9360,5867.03 h30 r180; Mechanical 43 "PCB EDGE" at 9720,6421.5 h30 r90; Top Assembly "N/A" at 9360,6005.5 h30 r180; Top Assembly "UPN" at 9360,6044.9 h30 r180
TX2: Mechanical 37 "2" at 9714.15,2332.52 h30 r90; Mechanical 37 "3" at 9714.15,2332.52 h30 r90; Mechanical 37 "4" at 10054.67,2337.74 h30 r90; Mechanical 37 "5" at 10054.67,2337.74 h30 r90; Mechanical 37 "1" at 9883.67,2336.27 h30 r90; Mechanical 39 "200X95" at 10227.67,2431.5 h30 r90; Mechanical 39 "200X95B" at 10287.67,2447.5 h30 r90; Mechanical 39 "200X90" at 10167.67,2431.5 h30 r90; Mechanical 39 "CNSMARAL687W375H171" at 9557.67,2639.5 h30 r90; Top Component Outline "26JUL16" at 9871,3102.64 h30 r180; Top Component Outline "QA/RGS" at 9871,3050.24 h30 r180; Top Component Outline "25JUL16" at 9871,2282.63 h30 r180; Top Component Outline "ADI/JRBL" at 9871,2255.03 h30 r180; Mechanical 43 "PCB EDGE" at 10231,2809.5 h30 r90; Top Assembly "N/A" at 9871,2393.5 h30 r180; Top Assembly "UPN" at 9871,2432.9 h30 r180
U5: Top Overlay "A" at 5317.48,4231.46 h30 r90; Top Overlay "1" at 5362.48,4201.46 h30 r180
U6: Bottom Component Center "9" at 17173.3,5382.6 h30; Bottom Component Center "14" at 17094.5,5334.3 h30; Bottom Component Center "12" at 17123.1,5382.6 h30; Bottom Component Center "11" at 17142.8,5382.6 h30; Bottom Component Center "10" at 17162.4,5382.6 h30; Bottom Component Center "13" at 17094.5,5354 h30; Bottom Component Center "5" at 17201.9,5295 h30; Bottom Component Center "6" at 17201.9,5314.7 h30; Bottom Component Center "8" at 17201.9,5354 h30; Bottom Component Center "7" at 17201.9,5334.3 h30; Bottom Component Center "16" at 17094.5,5295 h30; Bottom Component Center "15" at 17094.5,5314.7 h30; Bottom Component Center "20" at 17152.6,5324.5 h30; Bottom Component Center "1" at 17114.3,5266.4 h30; Bottom Component Center "2" at 17134,5266.4 h30; Bottom Component Center "3" at 17153.6,5266.4 h30; Bottom Component Center "4" at 17173.3,5266.4 h30
U7: Bottom Component Center "9" at 17388.3,5382.6 h30; Bottom Component Center "14" at 17309.5,5334.3 h30; Bottom Component Center "12" at 17338.1,5382.6 h30; Bottom Component Center "11" at 17357.8,5382.6 h30; Bottom Component Center "10" at 17377.4,5382.6 h30; Bottom Component Center "13" at 17309.5,5354 h30; Bottom Component Center "5" at 17416.9,5295 h30; Bottom Component Center "6" at 17416.9,5314.7 h30; Bottom Component Center "8" at 17416.9,5354 h30; Bottom Component Center "7" at 17416.9,5334.3 h30; Bottom Component Center "16" at 17309.5,5295 h30; Bottom Component Center "15" at 17309.5,5314.7 h30; Bottom Component Center "20" at 17367.6,5324.5 h30; Bottom Component Center "1" at 17329.3,5266.4 h30; Bottom Component Center "2" at 17349,5266.4 h30; Bottom Component Center "3" at 17368.6,5266.4 h30; Bottom Component Center "4" at 17388.3,5266.4 h30
U8: Bottom Component Center "9" at 14333.3,5382.6 h30; Bottom Component Center "14" at 14254.5,5334.3 h30; Bottom Component Center "12" at 14283.1,5382.6 h30; Bottom Component Center "11" at 14302.8,5382.6 h30; Bottom Component Center "10" at 14322.4,5382.6 h30; Bottom Component Center "13" at 14254.5,5354 h30; Bottom Component Center "5" at 14361.9,5295 h30; Bottom Component Center "6" at 14361.9,5314.7 h30; Bottom Component Center "8" at 14361.9,5354 h30; Bottom Component Center "7" at 14361.9,5334.3 h30; Bottom Component Center "16" at 14254.5,5295 h30; Bottom Component Center "15" at 14254.5,5314.7 h30; Bottom Component Center "20" at 14312.6,5324.5 h30; Bottom Component Center "1" at 14274.3,5266.4 h30; Bottom Component Center "2" at 14294,5266.4 h30; Bottom Component Center "3" at 14313.6,5266.4 h30; Bottom Component Center "4" at 14333.3,5266.4 h30
U9: Bottom Component Center "9" at 13948.3,5382.6 h30; Bottom Component Center "14" at 13869.5,5334.3 h30; Bottom Component Center "12" at 13898.1,5382.6 h30; Bottom Component Center "11" at 13917.8,5382.6 h30; Bottom Component Center "10" at 13937.4,5382.6 h30; Bottom Component Center "13" at 13869.5,5354 h30; Bottom Component Center "5" at 13976.9,5295 h30; Bottom Component Center "6" at 13976.9,5314.7 h30; Bottom Component Center "8" at 13976.9,5354 h30; Bottom Component Center "7" at 13976.9,5334.3 h30; Bottom Component Center "16" at 13869.5,5295 h30; Bottom Component Center "15" at 13869.5,5314.7 h30; Bottom Component Center "20" at 13927.6,5324.5 h30; Bottom Component Center "1" at 13889.3,5266.4 h30; Bottom Component Center "2" at 13909,5266.4 h30; Bottom Component Center "3" at 13928.6,5266.4 h30; Bottom Component Center "4" at 13948.3,5266.4 h30
U13: Bottom Component Center "3" at 7149,2635.1 h30; Bottom Component Center "4" at 7074,2635.1 h30; Bottom Component Center "1" at 7074,2552.5 h30; Bottom Component Center "2" at 7149,2552.5 h30
U14: Bottom Component Center "5" at 15060,5049.95 h30 r90; Bottom Component Center "2" at 14960,4734.95 h30 r90; Bottom Component Center "1" at 14910,4734.95 h30 r90; Bottom Component Center "4" at 15060,4734.95 h30 r90; Bottom Component Center "8" at 14910,5049.95 h30 r90; Bottom Component Center "7" at 14960,5049.95 h30 r90; Bottom Component Center "3" at 15010,4734.95 h30 r90; Bottom Component Center "6" at 15010,5049.95 h30 r90
USR_LED: Top Overlay "+" at 13612,4954.14 h30 r90